# Altium PCB PCB1.PcbDoc (part 1 of 4)
Units mm, origin at the board's own origin, x right, y up, seen from the top; angles counter-clockwise.
Board outline 100 x 100 mm, 4 copper layers (Component Side 1, Ground Plane, Power Plane, Component Side 2), stack 0.844 mm thick; 174 components, 192 nets, 1098 pads, 545 vias.
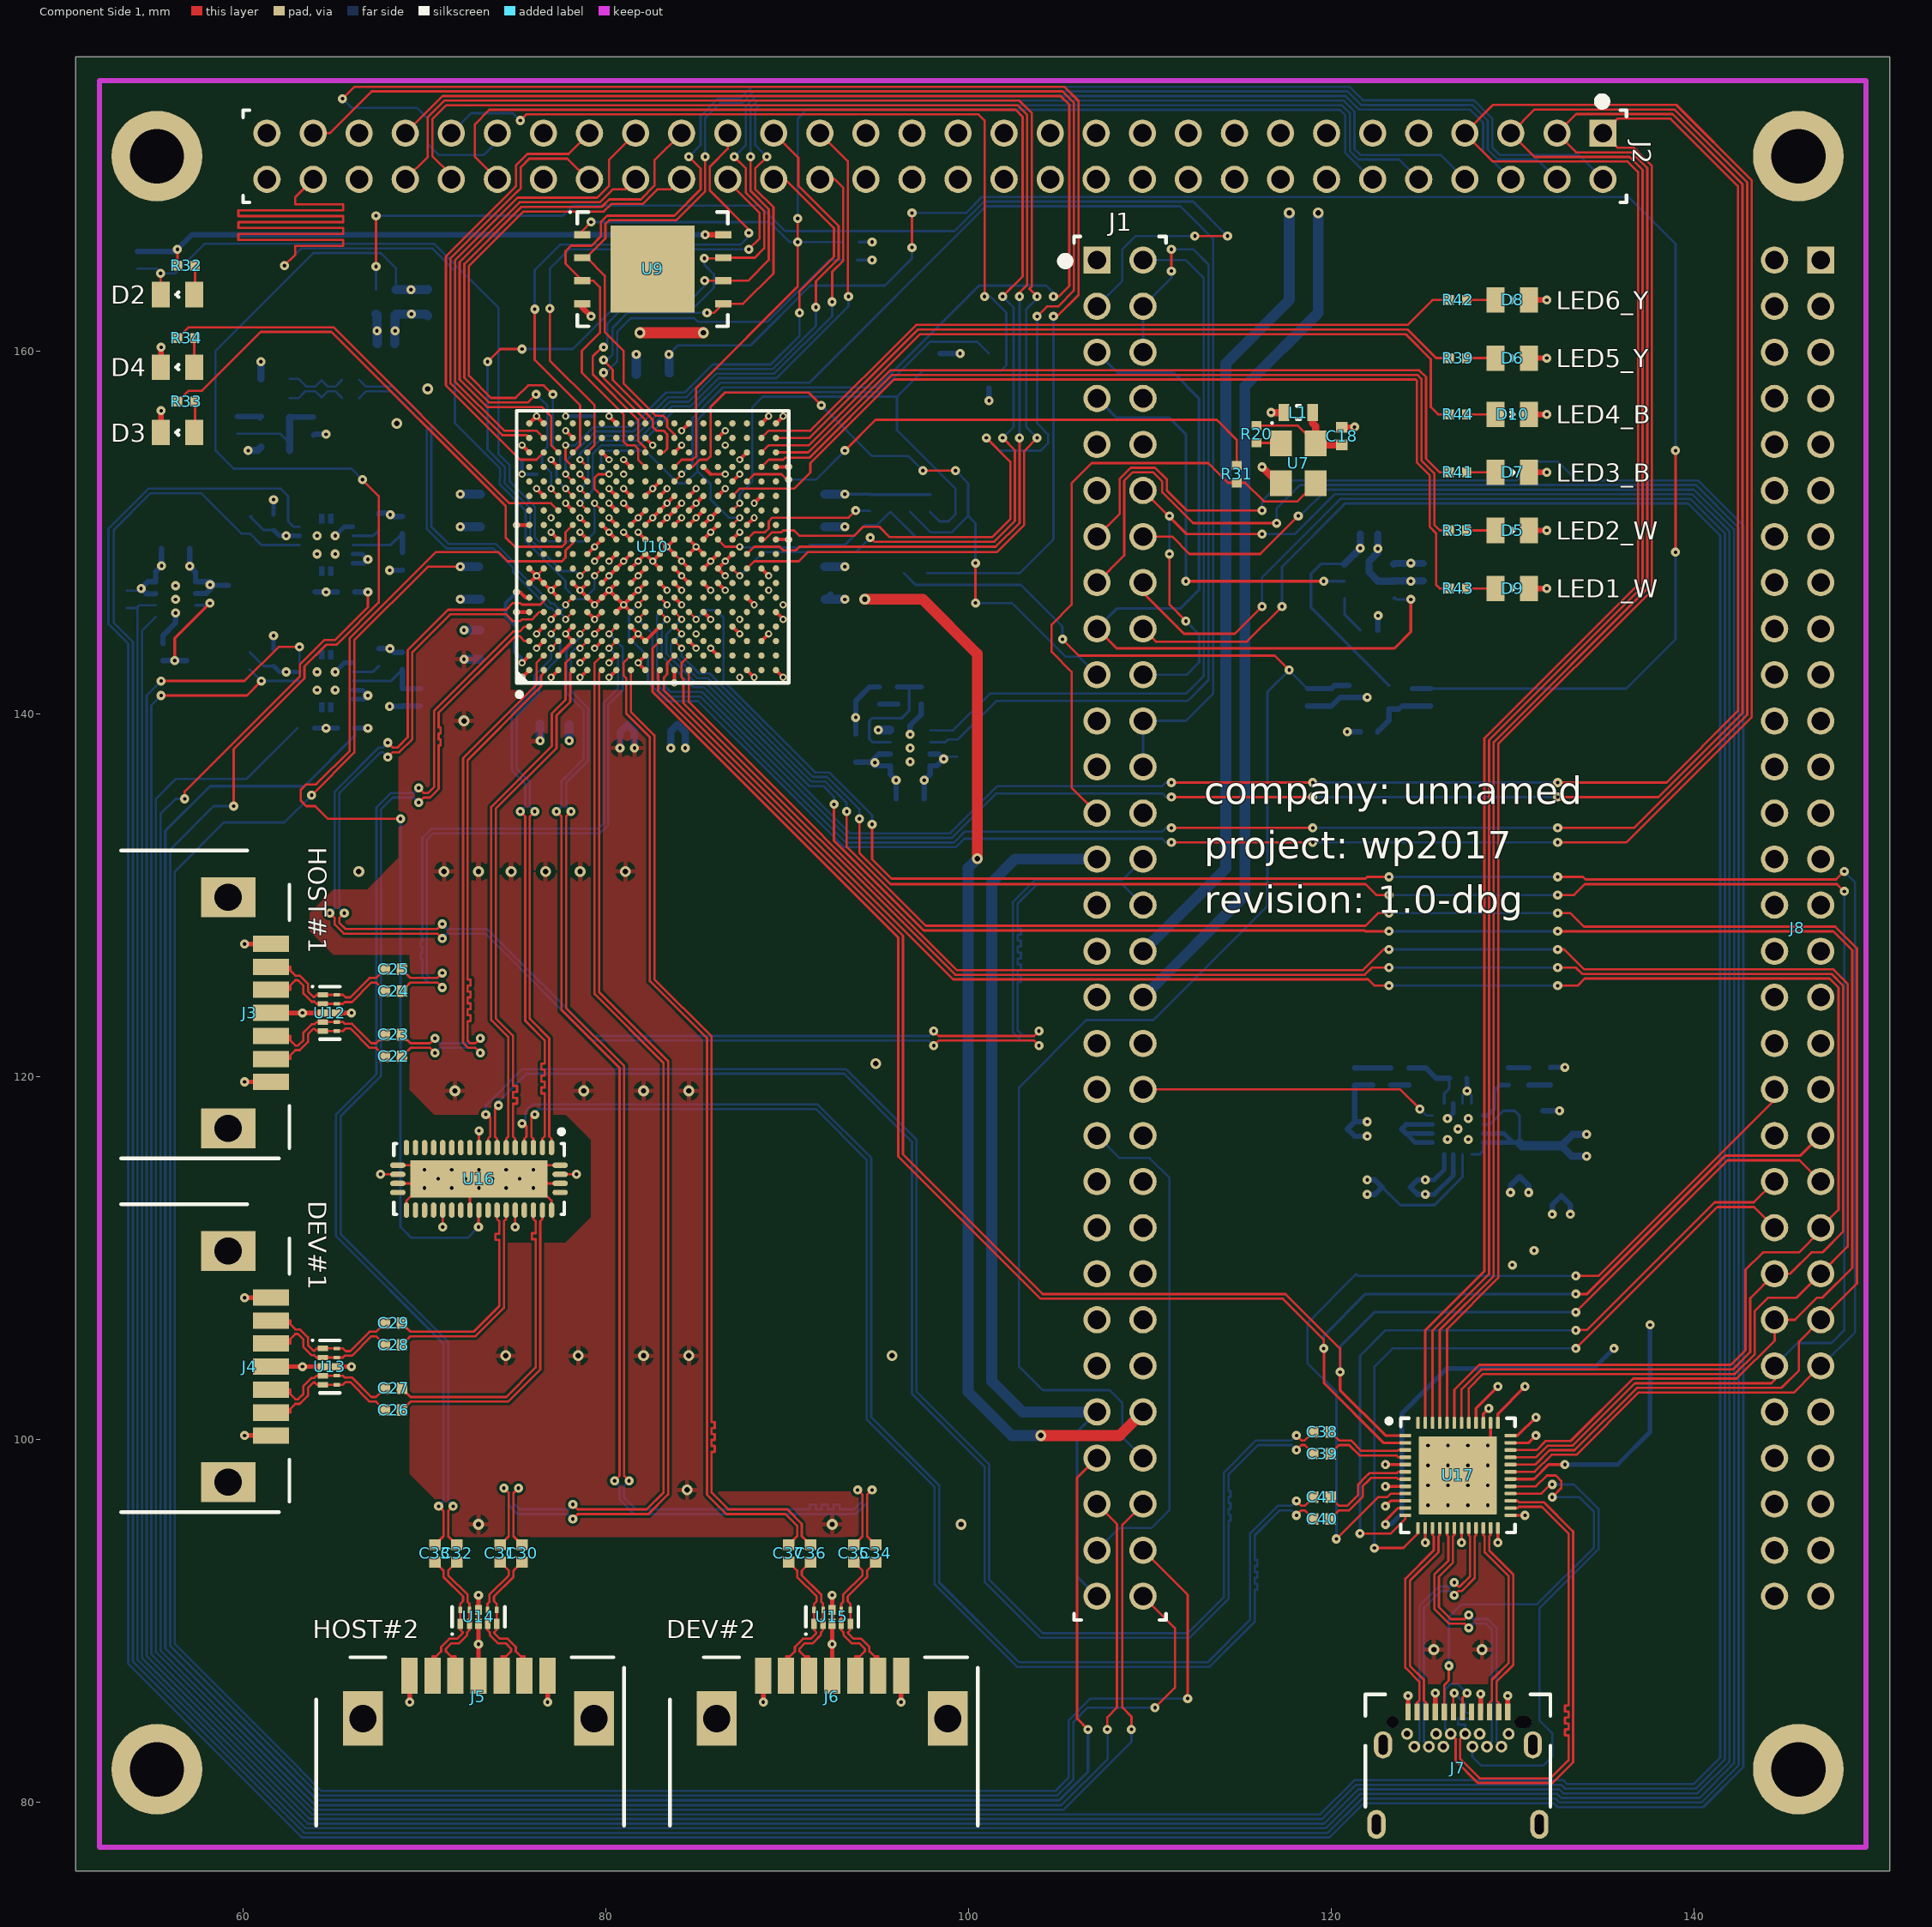
[diagram p0: Component Side 1 view]
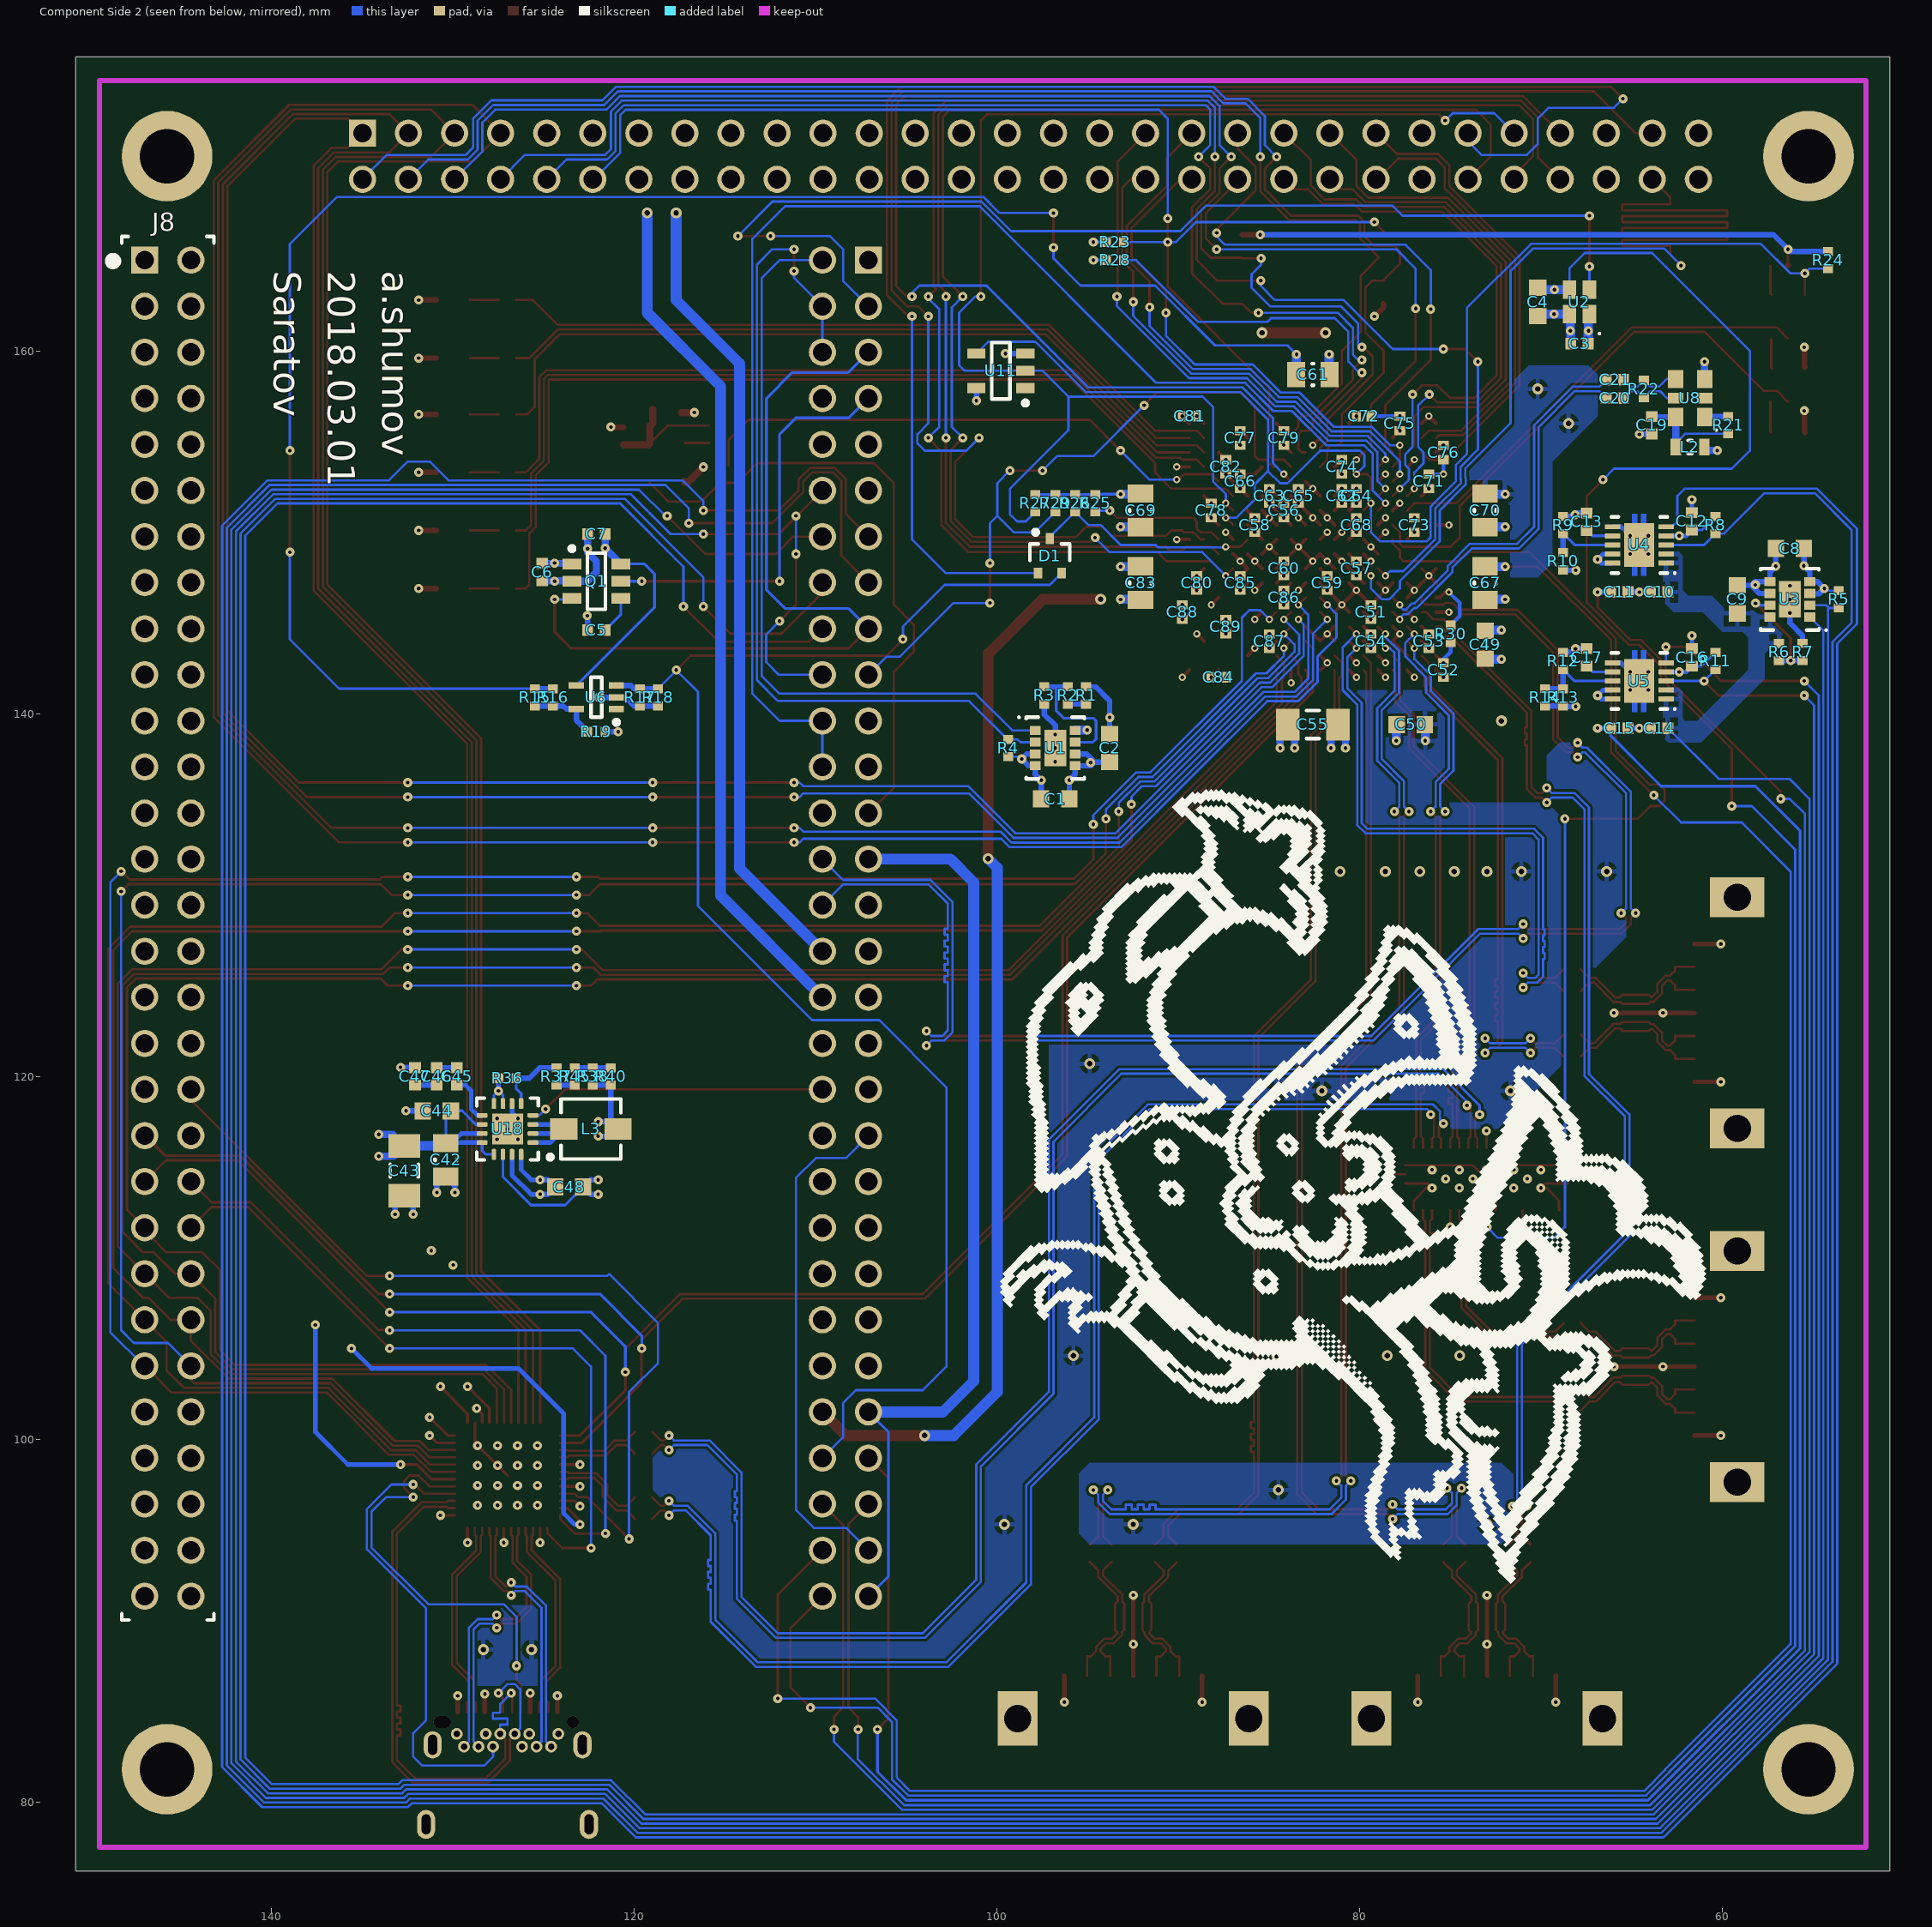
[diagram p1: Component Side 2 view, seen from below]
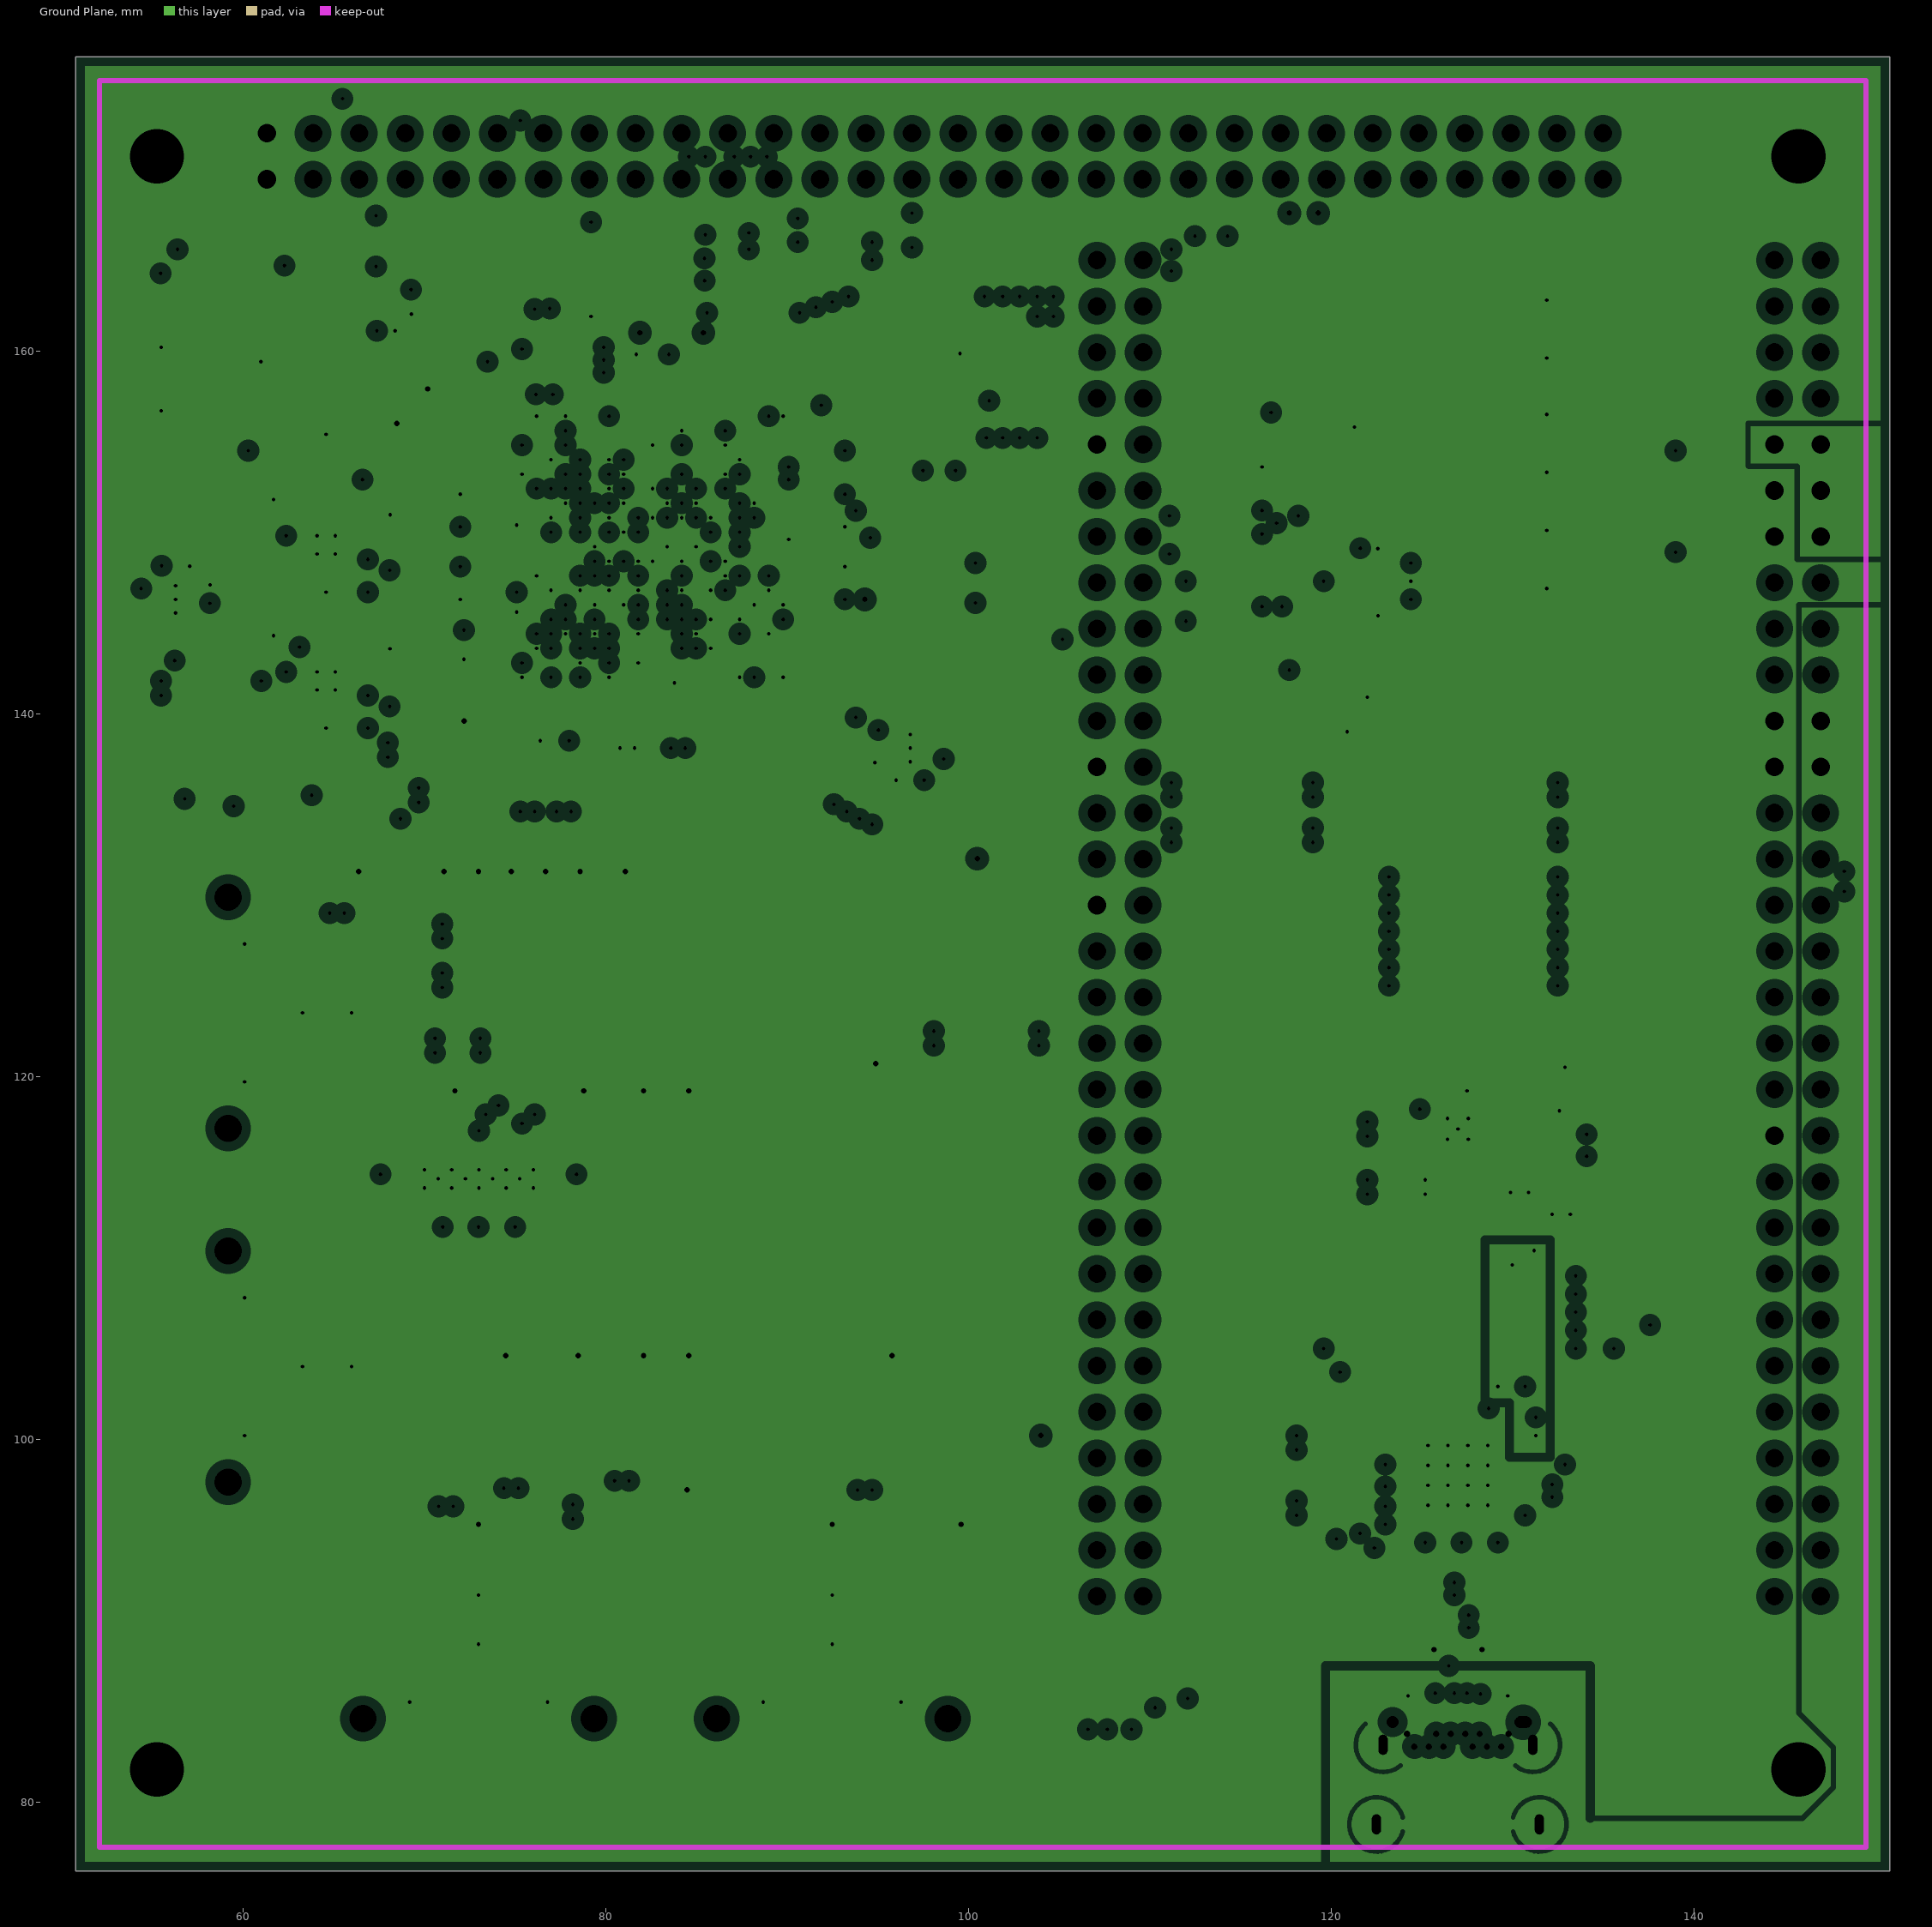
[diagram p2: Ground Plane, clearances drawn from the general rule]
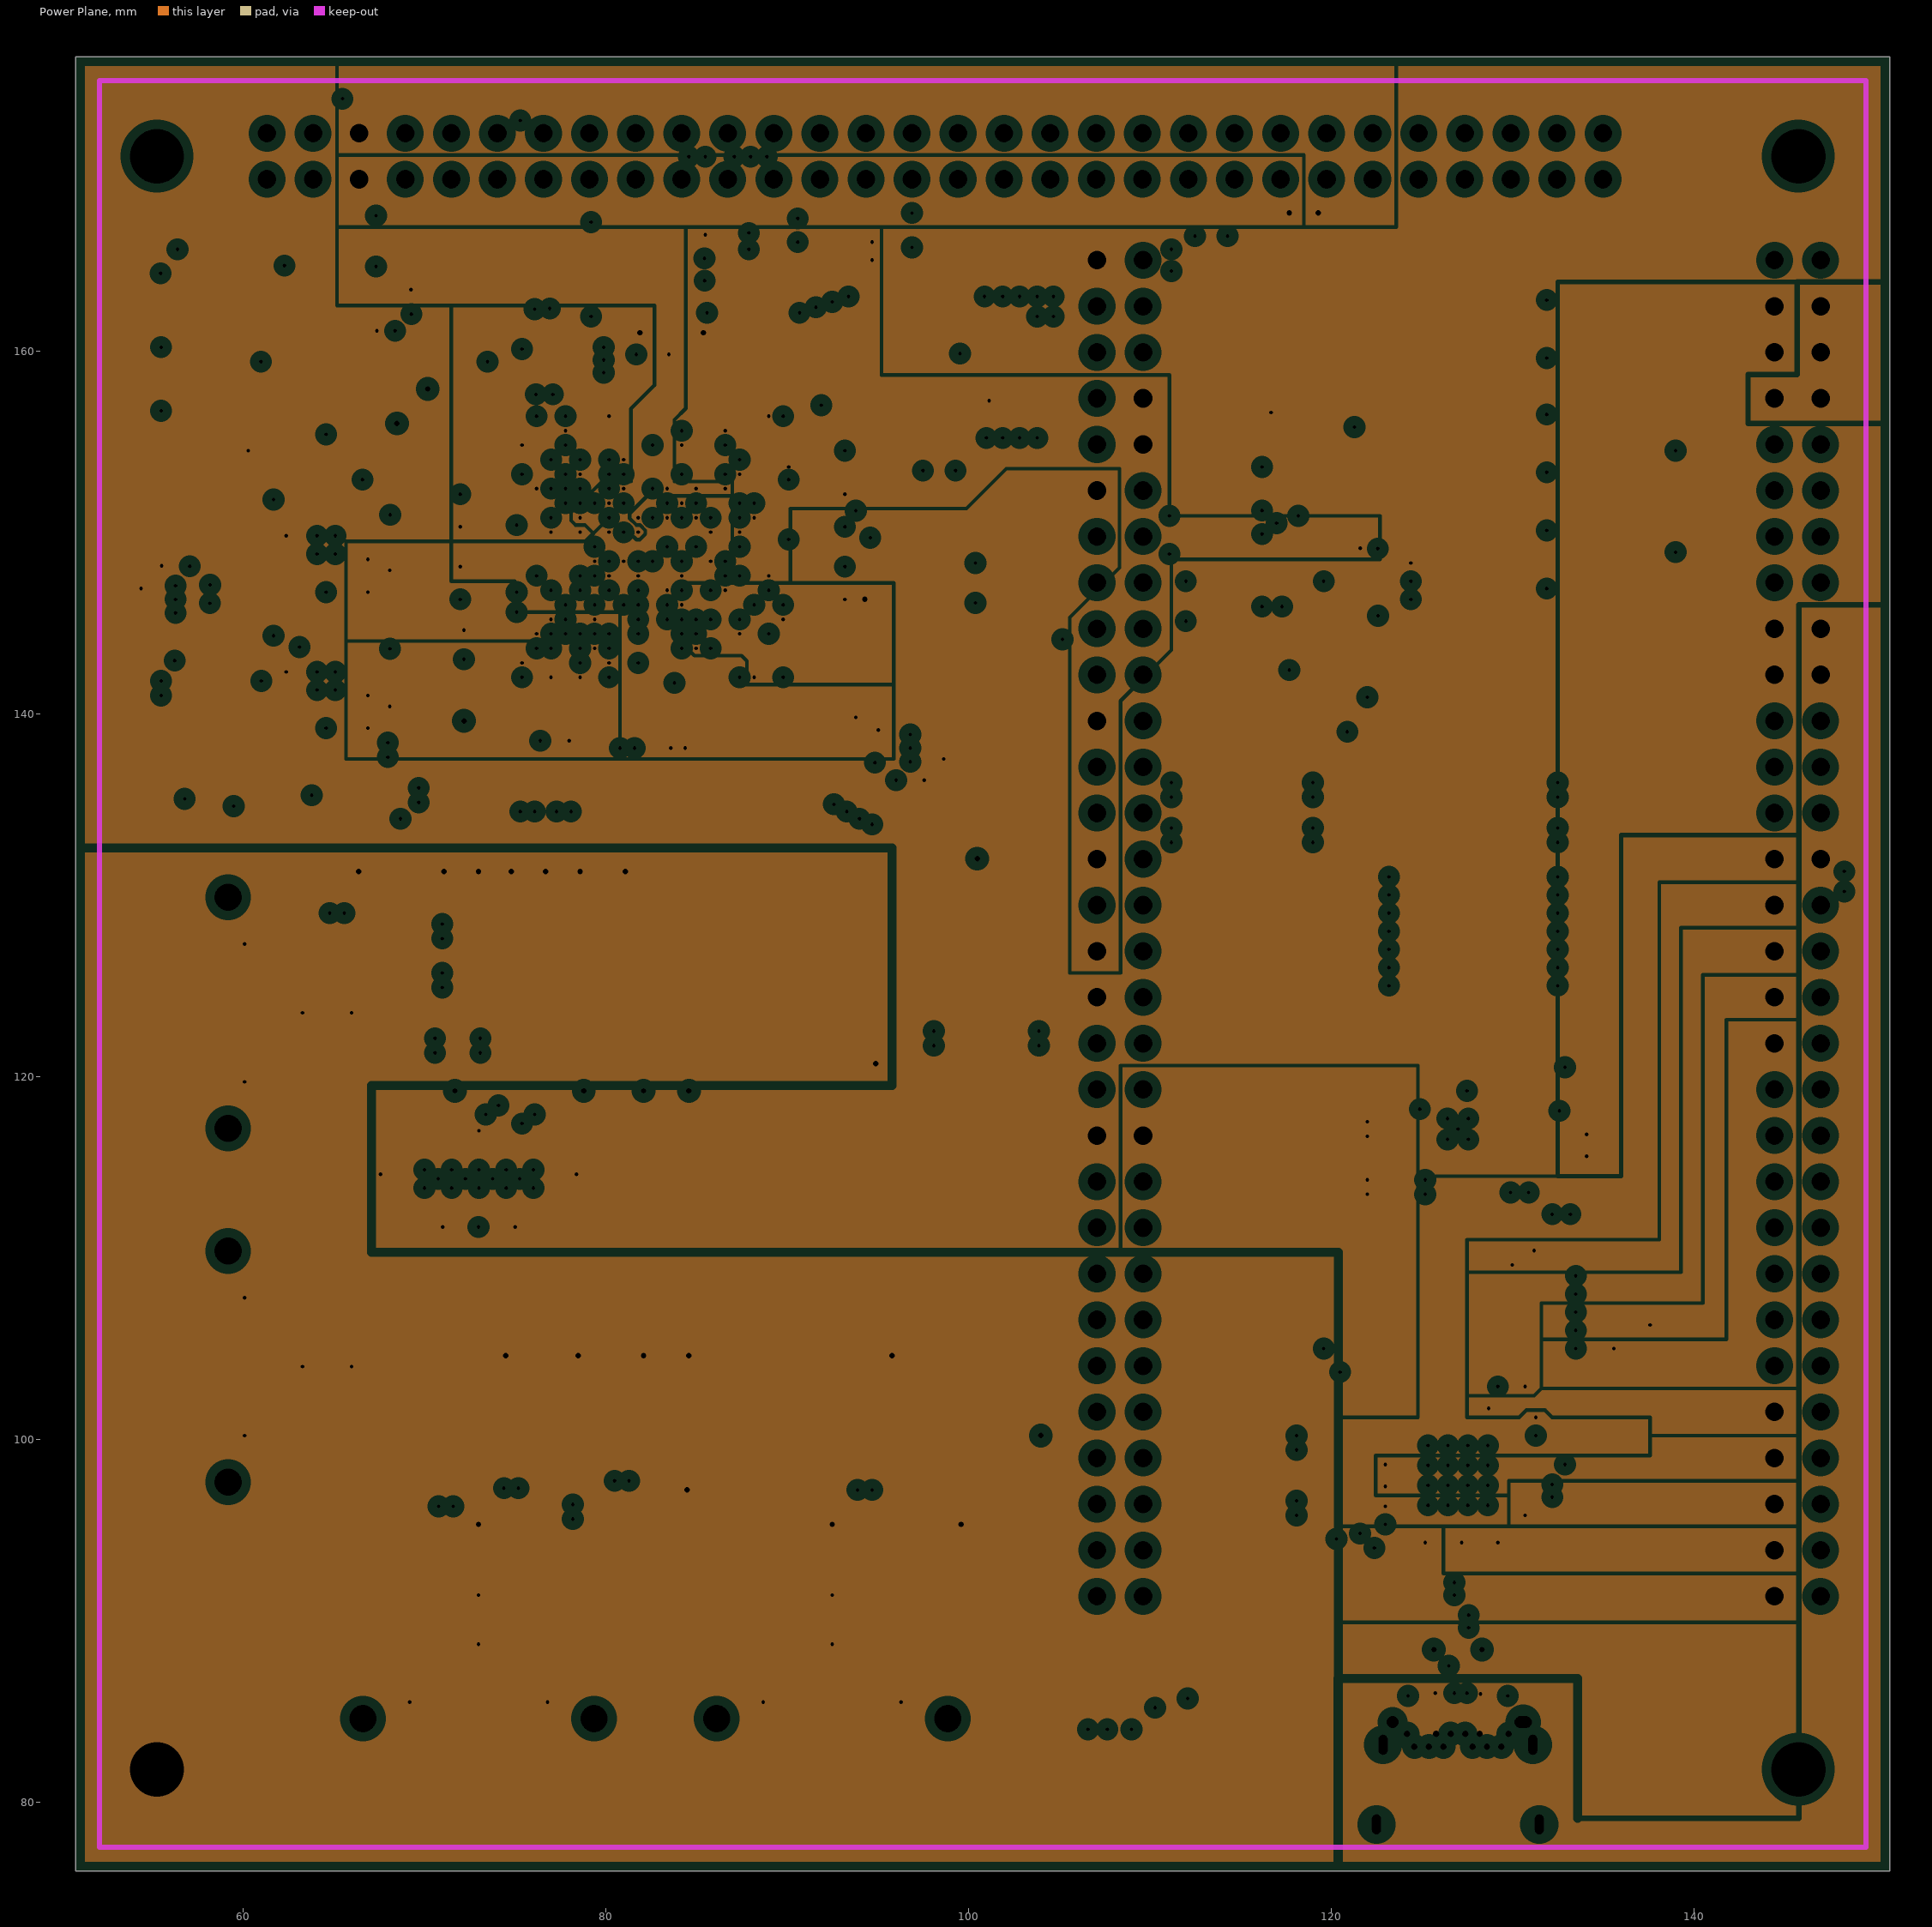
[diagram p3: Power Plane, clearances drawn from the general rule]
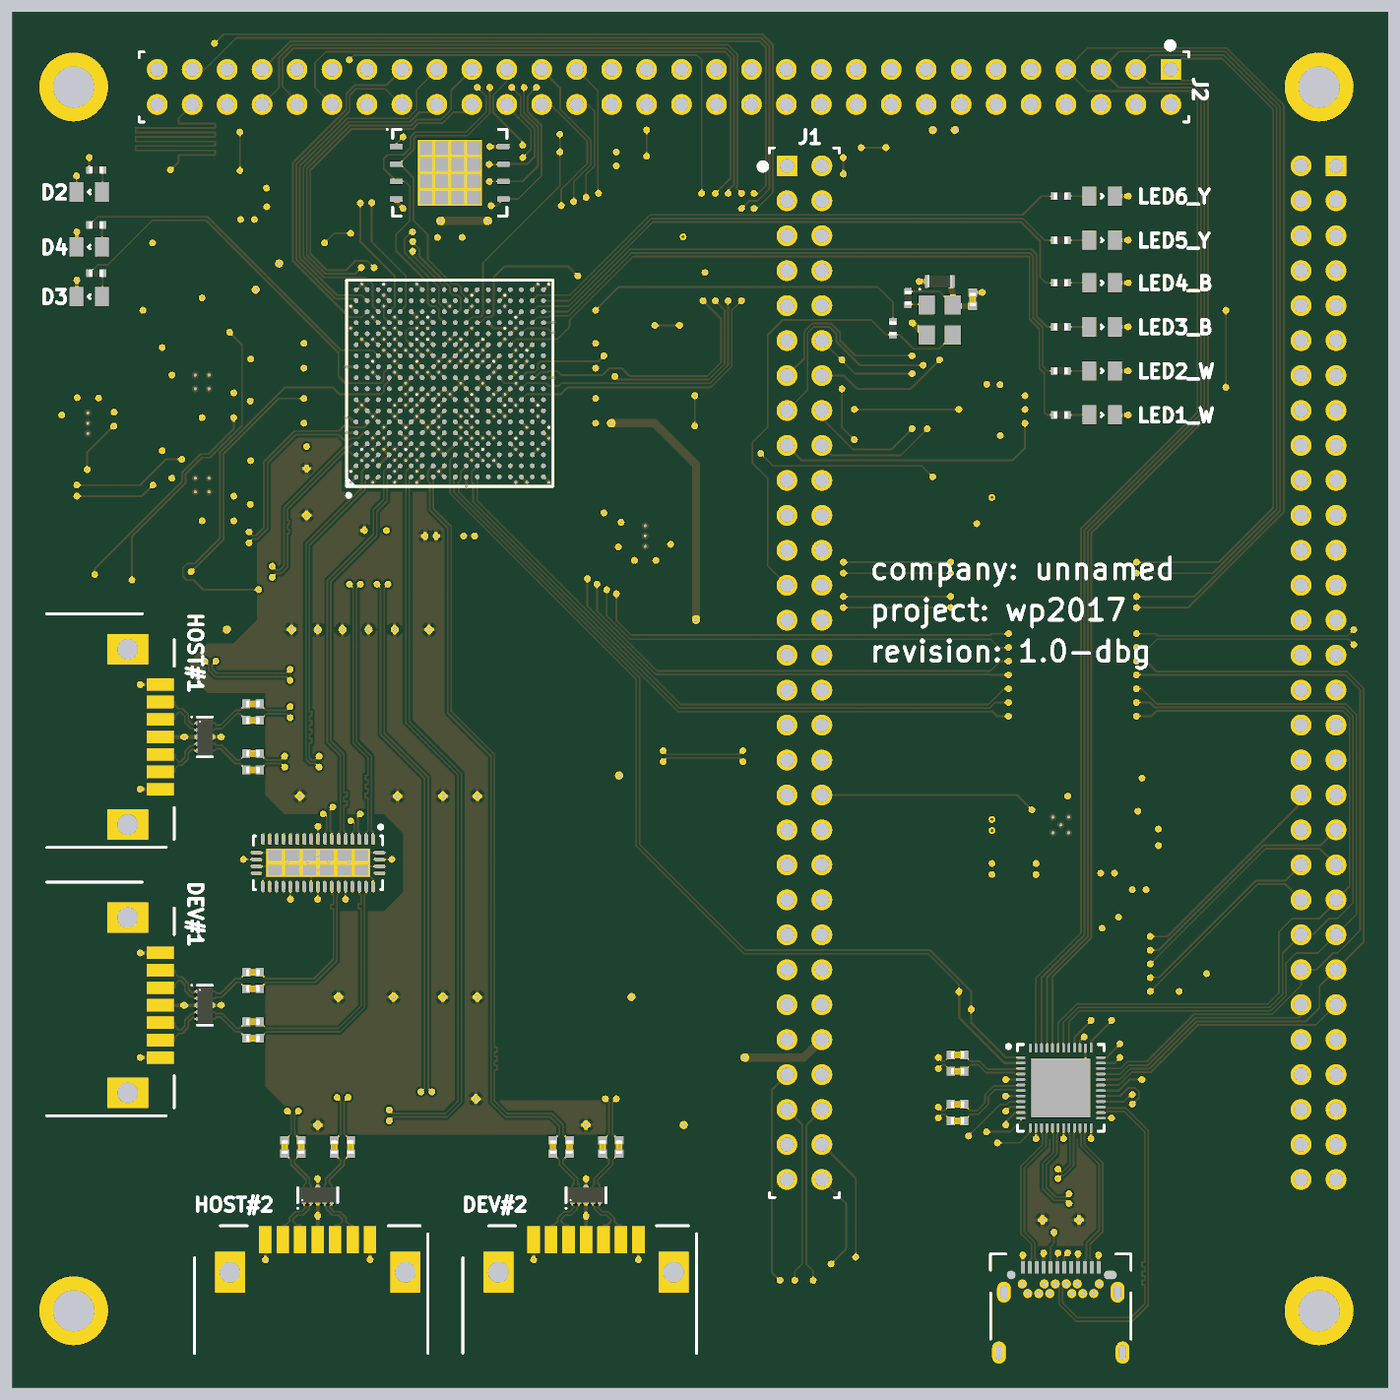
[diagram p6: 3D render of the assembled board from above, using the file's embedded part models]
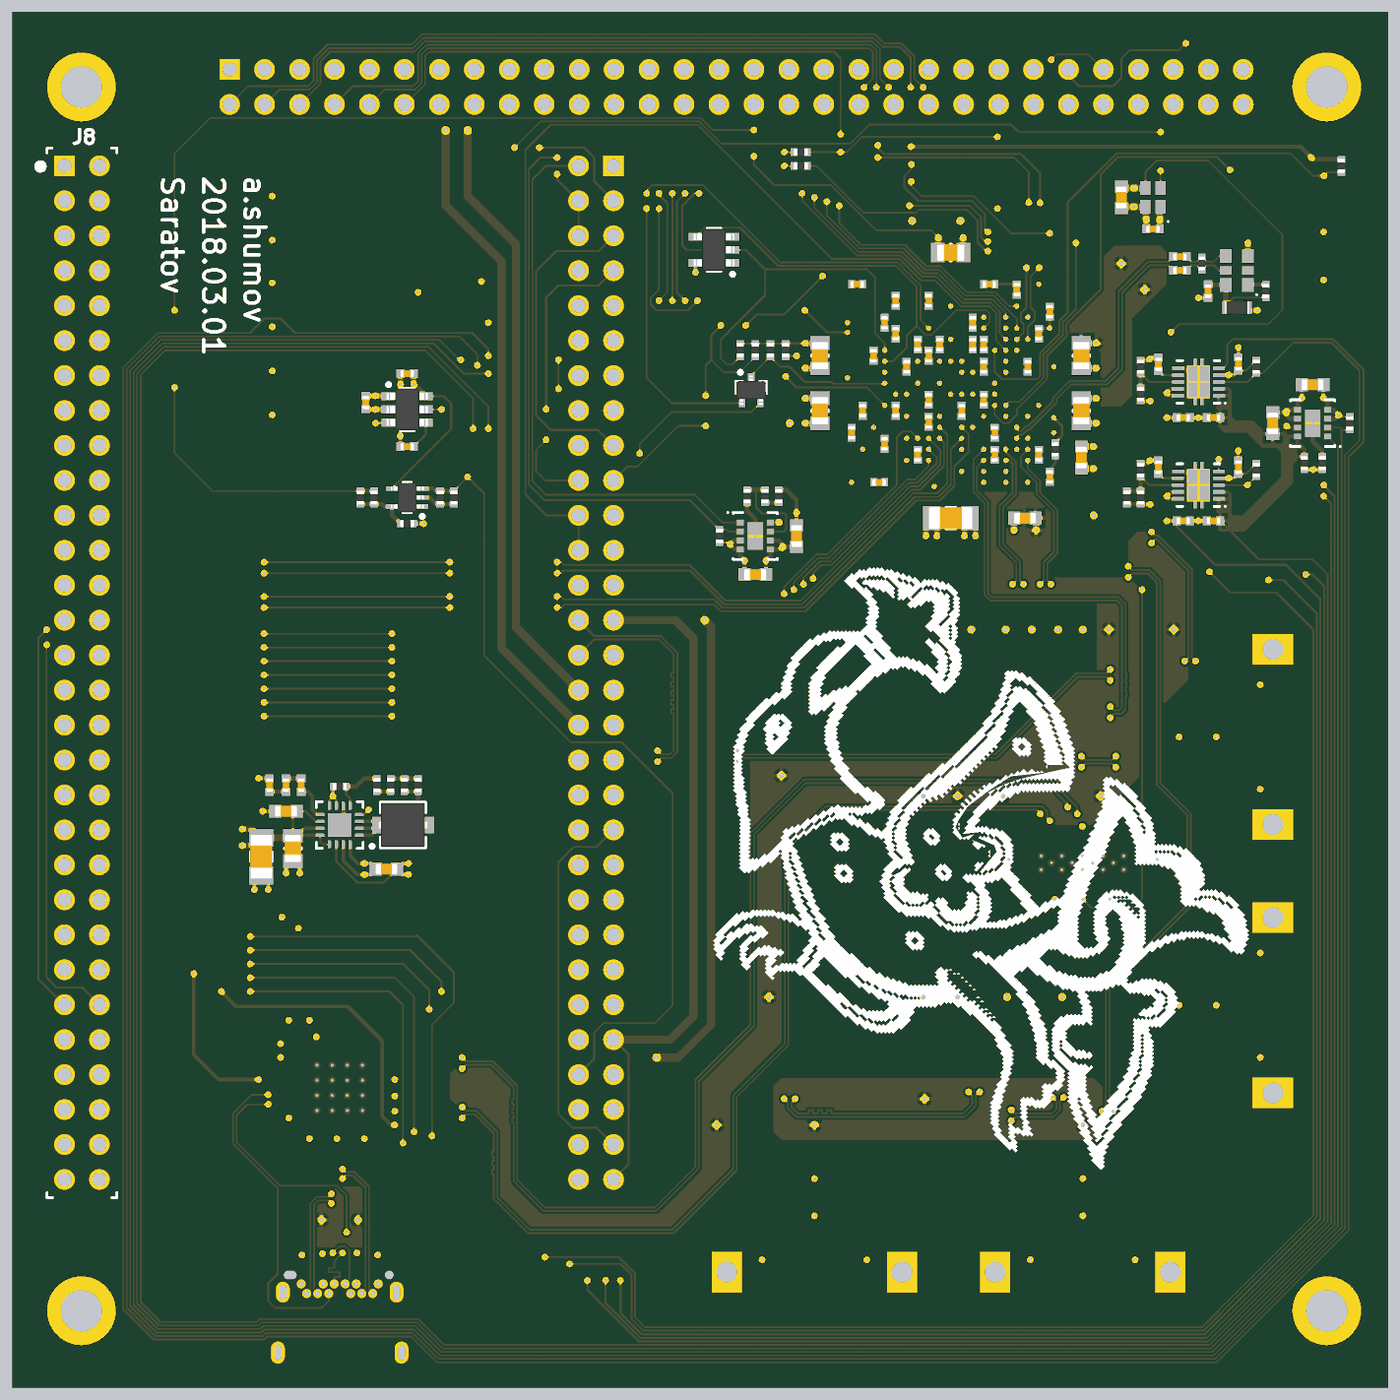
[diagram p7: 3D render of the assembled board from below, using the file's embedded part models]

## Layer stack, top to bottom
Top Solder: solder mask 0.0102, Solder Resist, Dk 3.5
Component Side 1: signal copper 0.0356
Dielectric 1: core 0.32, FR-4, Dk 4.8
Ground Plane: plane copper 0.036, net (Multiple Nets)
Dielectric 3: prepreg 0.127, Dk 4.2
Power Plane: plane copper 0.036, net (Multiple Nets)
Dielectric 4: core 0.254, Dk 4.2
Component Side 2: signal copper 0.0356
Bottom Solder: solder mask 0.0102, Solder Resist, Dk 3.5

## Board outline
50.8,76.2 150.8,76.2 150.8,176.2 50.8,176.2

## Design rules (kind name [scope] priority, off if disabled: settings)
Clearance [All] p1: gap=0.15 ignorepadtopadclearanceinfootprint=FALSE except(0.127: Track-Track)
DiffPairsRouting DiffPairsRouting_1 [WithinRoom('RoomFPGA')] p1: maxlimit=0.152 minlimit=0.102 mostfreqgap=0.127 toplayer_minwidth=0.102 toplayer_maxwidth=0.152 toplayer_prefwidth=0.127 bottomlayer_minwidth=0.102 bottomlayer_maxwidth=0.152 bottomlayer_prefwidth=0.127 maxuncoupledlength=12.7
DiffPairsRouting [InDifferentialPairClass('All Differential Pairs')] p2: maxlimit=0.508 minlimit=0.127 mostfreqgap=0.127 toplayer_minwidth=0.127 toplayer_maxwidth=0.127 toplayer_prefwidth=0.127 bottomlayer_minwidth=0.127 bottomlayer_maxwidth=0.127 bottomlayer_prefwidth=0.127 maxuncoupledlength=12.7
HoleSize [All] p1: absolutevalues=TRUE maxlimit=6.4 minlimit=0.2 maxpercent=80.000 minpercent=20.000
MatchedLengths [InNet('UCONN0_D_P') OR InNet('UCONN0_D_N')] p1: tolerance=1 checknetsindiffpair=TRUE checkdiffpairvsdiffpair=FALSE checkxsignals=FALSE checkothers=FALSE
MatchedLengths DiffPair_MatchedLengths [InDifferentialPairClass('All Differential Pairs')] p2: tolerance=0.1 checknetsindiffpair=TRUE checkdiffpairvsdiffpair=FALSE checkxsignals=FALSE checkothers=FALSE
MinimumAnnularRing [All] p1: minimumring=0.1
MinimumSolderMaskSliver MinimumSolderMaskSliver_1 [InComponent('U12') OR InComponent('U13') OR InComponent('U14') OR InComponent('U15') OR InComponent('J7') OR InComponent('U17')] p1: minsoldermaskwidth=0
MinimumSolderMaskSliver [All] p2: minsoldermaskwidth=0.1
PlaneClearance PlaneClearance_2 [IsVia] p1: clearance=0.2
PlaneClearance PlaneClearance_1 [InNet('UCONN0_PWR') OR InNet('UCONN0_GND')] p2: clearance=0.4
PlaneClearance [All] p3: clearance=0.508
PlaneConnect PlaneConnect_1 [InNet('UCONN0_PWR') OR InNet('UCONN0_GND')] p1: planeconnectstyle=Direct reliefexpansion=0.508 reliefentries=4 reliefconductorwidth=0.254 reliefairgap=0.254
PlaneConnect [All] p2: pad.planeconnectstyle=Relief pad.reliefexpansion=0.508 pad.reliefentries=4 pad.reliefconductorwidth=0.508 pad.reliefairgap=0.127 via.planeconnectstyle=Direct via.reliefexpansion=0.508 via.reliefentries=4 via.reliefconductorwidth=0.254 via.reliefairgap=0.254
PolygonConnect [All] p1: connectstyle=Relief reliefconductorwidth=0.254 reliefentries=4 polygonreliefangle="90 Angle" airgapwidth=0.254
RoomDefinition Sheet13 [InComponentClass('Sheet13')] p1 off: confinementstyle=ConfineIn formatcopy=TRUE lockcomponents=FALSE outline 0,0 50.8,0 50.8,25.4 0,25.4
RoomDefinition Sheet12 [InComponentClass('Sheet12')] p2 off: confinementstyle=ConfineIn formatcopy=TRUE lockcomponents=FALSE outline 0,0 50.8,0 50.8,25.4 0,25.4
RoomDefinition Sheet11 [InComponentClass('Sheet11')] p3 off: confinementstyle=ConfineIn formatcopy=TRUE lockcomponents=FALSE outline 0,0 50.8,0 50.8,25.4 0,25.4
RoomDefinition Sheet10 [InComponentClass('Sheet10')] p4 off: confinementstyle=ConfineIn formatcopy=TRUE lockcomponents=FALSE outline 0,0 50.8,0 50.8,25.4 0,25.4
RoomDefinition Sheet9 [InComponentClass('Sheet9')] p5 off: confinementstyle=ConfineIn formatcopy=TRUE lockcomponents=FALSE outline 0,0 50.8,0 50.8,25.4 0,25.4
RoomDefinition Sheet8 [InComponentClass('Sheet8')] p6 off: confinementstyle=ConfineIn formatcopy=TRUE lockcomponents=FALSE outline 0,0 50.8,0 50.8,25.4 0,25.4
RoomDefinition Sheet7 [InComponentClass('Sheet7')] p7 off: confinementstyle=ConfineIn formatcopy=TRUE lockcomponents=FALSE outline 0,0 50.8,0 50.8,25.4 0,25.4
RoomDefinition Sheet6 [InComponentClass('Sheet6')] p8 off: confinementstyle=ConfineIn formatcopy=TRUE lockcomponents=FALSE outline 0,0 50.8,0 50.8,25.4 0,25.4
RoomDefinition Sheet5 [InComponentClass('Sheet5')] p9 off: confinementstyle=ConfineIn formatcopy=TRUE lockcomponents=FALSE outline 0,0 50.8,0 50.8,25.4 0,25.4
RoomDefinition Sheet4 [InComponentClass('Sheet4')] p10 off: confinementstyle=ConfineIn formatcopy=TRUE lockcomponents=FALSE outline 0,0 50.8,0 50.8,25.4 0,25.4
RoomDefinition Sheet3 [InComponentClass('Sheet3')] p11 off: confinementstyle=ConfineIn formatcopy=TRUE lockcomponents=FALSE outline 0,0 50.8,0 50.8,25.4 0,25.4
RoomDefinition Sheet2 [InComponentClass('Sheet2')] p12 off: confinementstyle=ConfineIn formatcopy=TRUE lockcomponents=FALSE outline 0,0 50.8,0 50.8,25.4 0,25.4
RoomDefinition Sheet1 [InComponentClass('Sheet1')] p13 off: confinementstyle=ConfineIn formatcopy=TRUE lockcomponents=FALSE outline 0,0 50.8,0 50.8,25.4 0,25.4
RoutingVias [All] p1: holewidth=0.2 width=0.4 viastyle="Through Hole" minholewidth=0.2 minwidth=0.4 maxholewidth=6.3 maxwidth=6.5
SilkToSolderMaskClearance [IsPad] p1: minsilkscreentomaskgap=0.2 clearancetoexposedcopper=TRUE
SolderMaskExpansion SolderMaskExpansion_1 [IsVia] p1: expansion=0 useseparateexpansions=TRUE expansionbottom=0 soldermaskfromhole=TRUE
SolderMaskExpansion [All] p2: expansion=0.05
Width Width_1 [WithinRoom('RoomFPGA')] p1: maxlimit=0.152 minlimit=0.102 preferedwidth=0.127
Width [All] p2: maxlimit=1.27 minlimit=0.127 preferedwidth=0.127
24 further rules are at their usual default settings.

## Classes and differential pairs
component class Sheet13: C42 C43 C44 C45 C46 C47 C48 L3 R36 R37 R38 R40 R45 U18
component class Sheet12: C38 C39 C40 C41 U17
component class Sheet11: J7
component class Sheet10: U16
component class Sheet9: C22 C23 C24 C25 C26 C27 C28 C29 C30 C31 C32 C33 C34 C35 C36 C37 J3 J4 J5 J6 U12 U13 U14 U15
component class Sheet8: C55 C56 C57 C58 C59 C60 C61 C62 C63 C64 C65 C66 C67 C68 C69 C70 C71 C72 C73 C74 C75 C76 C77 C78 C79 C80 C81 C82 C83 C84 C85 C86 C87 C88 C89
component class Sheet7: D1 D2 R23 R24 R25 R26 R27 R28 R32 U9 U11
component class Sheet6: C49 C50 C51 C52 C53 C54 R30
component class Sheet5: D3 D4 D5 D6 D7 D8 D9 D10 Led6 R29 R31 R33 R34 R35 R39 R41 R42 R43 R44 U10
component class Sheet4: C18 C19 C20 C21 L1 L2 R20 R21 R22 U7 U8
component class Sheet3: J1 J2 J8
component class Sheet2: C8 C9 C10 C11 C12 C13 C14 C15 C16 C17 R5 R6 R7 R8 R9 R10 R11 R12 R13 R14 U3 U4 U5
component class Sheet1: C1 C2 C3 C4 C5 C6 C7 Q1 R1 R2 R3 R4 R15 R16 R17 R18 R19 U1 U2 U6
net class VL716_SPI: VL716_SPI_CLK VL716_SPI_CS VL716_SPI_D VL716_SPI_Q
net class MEM_SPI: SPI-CLK SPI-CS SPI-DQ0 SPI-DQ1 SPI-DQ2 SPI-DQ3
differential pair UCONN0_TX2: +UCONN0_TX2_P -UCONN0_TX2_N
differential pair UCONN0_TX1: +UCONN0_TX1_P -UCONN0_TX1_N
differential pair UCONN0_RX2: +UCONN0_RX2_P -UCONN0_RX2_N
differential pair UCONN0_RX1: +UCONN0_RX1_P -UCONN0_RX1_N
differential pair UCONN0_D: +UCONN0_D_P -UCONN0_D_N
differential pair U17A_TX: +U17A_TX_P -U17A_TX_N
differential pair U17A_RX: +U17A_RX_P -U17A_RX_N
differential pair U8_OUT: +U8_OUT_P -U8_OUT_N
differential pair J6_TX: +J6_TX_P -J6_TX_N
differential pair J6_RX: +J6_RX_P -J6_RX_N
differential pair J5_TX: +J5_TX_P -J5_TX_N
differential pair J5_RX: +J5_RX_P -J5_RX_N
differential pair J4_TX: +J4_TX_P -J4_TX_N
differential pair J4_RX: +J4_RX_P -J4_RX_N
differential pair J3_TX: +J3_TX_P -J3_TX_N
differential pair J3_RX: +J3_RX_P -J3_RX_N
differential pair ADV_MGT_CLK: +ADV_MGT_CLK_P -ADV_MGT_CLK_N
differential pair CLK_200M: +CLK_200M_P -CLK_200M_N
differential pair MGTSW_RX: +MGTSW_RX_P -MGTSW_RX_N
differential pair MGTSW_TX: +MGTSW_TX_P -MGTSW_TX_N
differential pair SCONN0_RX: +SCONN0_RX_P -SCONN0_RX_N
differential pair SCONN0_TX: +SCONN0_TX_P -SCONN0_TX_N
differential pair SCONN1_RX: +SCONN1_RX_P -SCONN1_RX_N
differential pair SCONN1_TX: +SCONN1_TX_P -SCONN1_TX_N
differential pair SCONN2_RX: +SCONN2_RX_P -SCONN2_RX_N
differential pair SCONN2_TX: +SCONN2_TX_P -SCONN2_TX_N
differential pair SCONN3_RX: +SCONN3_RX_P -SCONN3_RX_N
differential pair SCONN3_TX: +SCONN3_TX_P -SCONN3_TX_N
differential pair VL716_RX: +VL716_RX_P -VL716_RX_N
differential pair VL716_TX: +VL716_TX_P -VL716_TX_N

## Components (designator, comment, footprint, x,y, rotation, side; value= is the part's Value field where it differs from the comment)
C1 "10uF" CAPC1608X08N 96.8,135.3 r0 bottom
C2 "22uF" CAPC1608X08N 93.8,138.1 r90 bottom
C3 "4.7uF" CAPC1005X05N 67.9,160.4 r180 bottom
C4 "10uF" CAPC1608X08N 70.2,162.7 r90 bottom
C5 "10nF (16V)" CAPC1005X05N 122.1,144.6 r180 bottom
C6 "4.7uF" CAPC1005X05N 125.1,147.8 r90 bottom
C7 "470nF" CAPC1005X05N 122.1,149.9 r180 bottom
C8 "10uF" CAPC1608X08N 56.3,149.1 r180 bottom
C9 "22uF" CAPC1608X08N 59.2,146.3 r270 bottom
C10 "4.7uF" CAPC1005X05N 63.5,146.7 r180 bottom
C11 "4.7uF" CAPC1005X05N 65.7,146.7 r0 bottom
C12 "4.7uF" CAPC1005X05N 61.7,150.6 r270 bottom
C13 "10nF" CAPC1005X05N 67.5,150.58 r270 bottom
C14 "4.7uF" CAPC1005X05N 63.5,139.2 r180 bottom
C15 "4.7uF" CAPC1005X05N 65.7,139.2 r0 bottom
C16 "4.7uF" CAPC1005X05N 61.7,143.1 r270 bottom
C17 "10nF" CAPC1005X05N 67.5,143.1 r270 bottom
C18 "470nF" CAPC1005X05N 120.6,155.3 r90 top
C19 "470nF" CAPC1005X05N 63.9,155.9 r270 bottom
C20 "100nF" CAPC1005X05N 65.95,157.4 r180 bottom
C21 "100nF" CAPC1005X05N 65.95,158.4 r180 bottom
C22 "100nF" CAPC1005X05N 68.3,121.1 r180 top
C23 "100nF" CAPC1005X05N 68.3,122.3 r180 top
C24 "100nF" CAPC1005X05N 68.3,124.7 r180 top
C25 "100nF" CAPC1005X05N 68.3,125.9 r180 top
C26 "100nF" CAPC1005X05N 68.3,101.6 r180 top
C27 "100nF" CAPC1005X05N 68.3,102.8 r180 top
C28 "100nF" CAPC1005X05N 68.3,105.2 r180 top
C29 "100nF" CAPC1005X05N 68.3,106.4 r180 top
C30 "100nF" CAPC1005X05N 75.4,93.7 r270 top
C31 "100nF" CAPC1005X05N 74.2,93.7 r270 top
C32 "100nF" CAPC1005X05N 71.8,93.7 r270 top
C33 "100nF" CAPC1005X05N 70.6,93.7 r270 top
C34 "100nF" CAPC1005X05N 94.9,93.7 r270 top
C35 "100nF" CAPC1005X05N 93.7,93.7 r270 top
C36 "100nF" CAPC1005X05N 91.3,93.7 r270 top
C37 "100nF" CAPC1005X05N 90.1,93.7 r270 top
C38 "100nF" CAPC1005X05N 119.5,100.4 r180 top
C39 "100nF" CAPC1005X05N 119.5,99.2 r180 top
C40 "100nF" CAPC1005X05N 119.5,95.6 r180 top
C41 "100nF" CAPC1005X05N 119.5,96.8 r180 top
C42 "47uF" CAPC2012X12N 130.4,115.4 r270 bottom
C43 "10uF (25V)" CAPC3216X16N 132.7,114.8 r270 bottom
C44 "100nF" CAPC1608X08N 130.9,118.1 r180 bottom
C45 "10nF" CAPC1005X05N 129.8,120 r270 bottom
C46 "10nF" CAPC1005X05N 130.9,120 r90 bottom
C47 "10nF" CAPC1005X05N 132.1,120 r270 bottom
C48 "22uF" CAPC1608X08N 123.6,113.9 r0 bottom
C49 "4.7uF" CAPC1608X08N 73.1,143.8 r90 bottom
C50 "4.7uF" CAPC1608X08N 77.2,139.4 r0 bottom
C51 "100nF" CAPC1005X05L 79.4,145.6 r270 bottom
C52 "100nF" CAPC1005X05L 75.4,142.4 r90 bottom
C53 "100nF" CAPC1005X05L 76.2,144 r90 bottom
C54 "100nF" CAPC1005X05L 79.4,144 r270 bottom
C55 "100uF" CAPC3216X16N 82.6,139.4 r0 bottom
C56 "4.7uF" CAPC1005X05L 84.2,151.2 r90 bottom
C57 "4.7uF" CAPC1005X05L 80.2,148 r270 bottom
C58 "470nF" CAPC1005X05L 85.8,150.4 r270 bottom
C59 "470nF" CAPC1005X05L 81.8,147.2 r90 bottom
C60 "470nF" CAPC1005X05L 84.2,148 r270 bottom
C61 "47uF" CAPC2012X12N 82.6,158.7 r180 bottom
C62 "4.7uF" CAPC1005X05L 81,152 r270 bottom
C63 "4.7uF" CAPC1005X05L 85,152 r270 bottom
C64 "470nF" CAPC1005X05L 80.2,152 r90 bottom
C65 "470nF" CAPC1005X05L 83.4,152 r270 bottom
C66 "470nF" CAPC1005X05L 86.6,152.8 r90 bottom
C67 "47uF" CAPC2012X12N 73.1,147.2 r90 bottom
C68 "470nF" CAPC1005X05L 80.2,150.4 r90 bottom
C69 "47uF" CAPC2012X12N 92.1,151.2 r90 bottom
C70 "47uF" CAPC2012X12N 73.1,151.2 r270 bottom
C71 "4.7uF" CAPC1005X05L 76.2,152.8 r270 bottom
C72 "4.7uF" CAPC1005X05L 79.8,156.4 r0 bottom
C73 "470nF" CAPC1005X05L 77,150.4 r270 bottom
C74 "470nF" CAPC1005X05L 81,153.6 r90 bottom
C75 "470nF" CAPC1005X05L 77.8,156 r270 bottom
C76 "470nF" CAPC1005X05L 75.4,154.4 r90 bottom
C77 "4.7uF" CAPC1005X05L 86.6,155.2 r90 bottom
C78 "4.7uF" CAPC1005X05L 88.2,151.2 r270 bottom
C79 "470nF" CAPC1005X05L 84.2,155.2 r270 bottom
C80 "470nF" CAPC1005X05L 89,147.2 r90 bottom
C81 "470nF" CAPC1005X05L 89.4,156.4 r180 bottom
C82 "470nF" CAPC1005X05L 87.4,153.6 r270 bottom
C83 "47uF" CAPC2012X12N 92.1,147.2 r270 bottom
C84 "4.7uF" CAPC1005X05L 87.8,142 r0 bottom
C85 "4.7uF" CAPC1005X05L 86.6,147.2 r270 bottom
C86 "470nF" CAPC1005X05L 84.2,146.4 r270 bottom
C87 "470nF" CAPC1005X05L 85,144 r270 bottom
C88 "470nF" CAPC1005X05L 89.8,145.6 r270 bottom
C89 "470nF" CAPC1005X05L 87.4,144.8 r270 bottom
D1 "BAT54AW-7-F" BAT54AW-7-F 97.1,148.7 r90 bottom
D2 "DONE" LEDC2012X10N 56.4,163.1 r0 top
D3 "RED" LEDC2012X10N 56.4,155.5 r0 top
D4 "GREEN" LEDC2012X10N 56.4,159.1 r0 top
D5 "LED2_W" LEDC2012X10N 130,150.1 r180 top
D6 "LED5_Y" LEDC2012X10N 130,159.6 r180 top
D7 "LED3_B" LEDC2012X10N 130,153.3 r180 top
D8 "LED6_Y" LEDC2012X10N 130,162.8 r180 top
D9 "LED1_W" LEDC2012X10N 130,146.9 r180 top
D10 "LED4_B" LEDC2012X10N 130,156.5 r180 top
J1 "60PIN-HEADER" 60PIN-HEADER#1 107.1,165 r0 top
J2 "60PIN-HEADER" 60PIN-HEADER#1 135,172 r270 top
J3 "HOST#1" 5607-4200-SH 58.3,123.5 r90 top
J4 "DEV#1" 5607-4200-SH 58.3,104 r90 top
J5 "HOST#2" 5607-4200-SH 73,83.7 r180 top
J6 "DEV#2" 5607-4200-SH 92.5,83.7 r180 top
J7 "MC001002" MC001002 127,84.4 r0 top
J8 "60PIN-HEADER" 60PIN-HEADER#2 147,165 r180 top
L1 "BKP1608HS121-T" INDC1608X08N 118.2,156.6 r180 top
L2 "BKP1608HS121-T" INDC1608X08N 61.8,154.7 r180 bottom
L3 "2.2uH" IHLP1212BZER2R2M11 122.4,117.1 r180 bottom
Q1 "TPS22918DBVR" TPS22918DBVR 122.1,147.3 r180 bottom
R1 "20K" RESC1005X05N 95.1,141 r90 bottom
R2 "20K" RESC1005X05N 96.1,141 r270 bottom
R3 "160K" RESC1005X05N 97.4,141 r90 bottom
R4 "4K99" RESC1005X05N 99.4,138.1 r270 bottom
R5 "4K99" RESC1005X05N 53.6,146.3 r90 bottom
R6 "110K" RESC1005X05N 56.9,143.4 r90 bottom
R7 "160K" RESC1005X05N 55.6,143.4 r270 bottom
R8 "4K99" RESC1005X05N 60.4,150.4 r90 bottom
R9 "4K99" RESC1005X05N 68.8,150.4 r90 bottom
R10 "1K3" RESC1005X05N 68.8,148.4 r270 bottom
R11 "4K99" RESC1005X05N 60.4,142.9 r90 bottom
R12 "4K99" RESC1005X05N 68.8,142.9 r270 bottom
R13 "4K99" RESC1005X05N 68.8,140.9 r90 bottom
R14 "4K99" RESC1005X05N 69.8,140.9 r90 bottom
R15 "4K99" RESC1005X05N 125.5,140.9 r90 bottom
R16 "4K99" RESC1005X05N 124.5,140.9 r90 bottom
R17 "20K" RESC1005X05N 119.7,140.9 r90 bottom
R18 "20K" RESC1005X05N 118.7,140.9 r90 bottom
R19 "8K2" RESC1005X05N 122.1,139 r0 bottom
R20 "4K99" RESC1005X05N 115.9,155.4 r270 top
R21 "4K99" RESC1005X05N 59.7,155.9 r90 bottom
R22 "100R" RESC1005X05N 64.35,157.9 r90 bottom
R23 "4K99" RESC1005X05N 93.5,166 r180 bottom
R24 "4K99" RESC1005X05N 54.2,165 r270 bottom
R25 "4K99" RESC1005X05N 94.6,151.6 r270 bottom
R26 "4K99" RESC1005X05N 95.7,151.6 r270 bottom
R27 "4K99" RESC1005X05N 97.9,151.6 r270 bottom
R28 "1K3" RESC1005X05N 93.5,165 r0 bottom
R29 "4K99" RESC1005X05N 96.8,151.6 r270 bottom
R30 "100R" RESC1005X05N 75,144.4 r90 bottom
R31 "33R" RESC1005X05N 114.8,153.2 r270 top
R32 "1K3" RESC1005X05N 56.9,164.7 r180 top
R33 "1K3" RESC1005X05N 56.9,157.2 r180 top
R34 "1K3" RESC1005X05N 56.9,160.7 r180 top
R35 "1K3" RESC1005X05N 127,150.1 r180 top
R36 "160K" RESC1005X05N 127,119.9 r180 bottom
R37 "200K" RESC1005X05N 124.3,120 r90 bottom
R38 "200K" RESC1005X05N 122.3,120 r270 bottom
R39 "1K3" RESC1005X05N 127,159.6 r180 top
R40 "200K" RESC1005X05N 121.3,120 r270 bottom
R41 "1K3" RESC1005X05N 127,153.3 r180 top
R42 "1K3" RESC1005X05N 127,162.8 r180 top
R43 "1K3" RESC1005X05N 127,146.9 r180 top
R44 "1K3" RESC1005X05N 127,156.5 r180 top
R45 "200K" RESC1005X05N 123.3,120 r270 bottom
U1 "TPS82085SILR" TPS82085SILR 96.8,138.1 r180 bottom
U2 "LXDC2HL18A-052" LXDC2HL18A-052 67.9,162.7 r0 bottom
U3 "TPS82085SILR" TPS82085SILR 56.3,146.3 r0 bottom
U4 "TPS74801DRCR" TPS74801DRCR 64.6,149.3 r0 bottom
U5 "TPS74801DRCR" TPS74801DRCR 64.6,141.8 r0 bottom
U6 "TPS3805H33DCKR" TPS3805H33DCKR 122.1,140.9 r0 bottom
U7 "SiT1602BI-23-33E-25.000000G" SiT1602BI-23-33E-25.000000G 118.2,153.8 r0 top
U8 "DSC1123CI2-200.0000" DSC1123CI2-200.0000 61.8,157.4 r0 bottom
U9 "S25FL256SAGNFI003" S25FL256SAGNFI003 82.6,164.5 r0 top
U10 "XC7A35T-2CSG325I" XC7A35T-2CSG325I 82.6,149.2 r90 top
U11 "SN74LVC1G14DBVR" SN74LVC1G14DBVR 99.8,158.9 r0 bottom
U12 "TPD4E05U06DQAR" TPD4E05U06DQAR 64.8,123.5 r0 top
U13 "TPD4E05U06DQAR" TPD4E05U06DQAR 64.8,104 r0 top
U14 "TPD4E05U06DQAR" TPD4E05U06DQAR 73,90.2 r90 top
U15 "TPD4E05U06DQAR" TPD4E05U06DQAR 92.5,90.2 r90 top
U16 "HD3SS3415RUAR" HD3SS3415RUAR 73.025,114.35 r270 top
U17 "VL716-Q4" VL716-Q4 127,98 r0 top
U18 "TPS62130RGTR" TPS62130RGTR 127,117.1 r0 bottom

## Footprints (in the part's own frame and the unit in brackets; to place one, negate y for a bottom-side part, rotate by r counter-clockwise, add the part's x,y. Pads: shape width x height; smd on the part's side, far side on the other; paste and mask are expansions set on the pad)
60PIN-HEADER#1 [mm] "60PIN-HEADER"
  rect 1.5x1.5 hole 1.02 mask+0: 1(0,0)
  round 1.5 hole 1.02 mask+0: 2(2.54,0) 3(0,-2.54) 4(2.54,-2.54) 5(0,-5.08) 6(2.54,-5.08) 7(0,-7.62) 8(2.54,-7.62) 9(0,-10.16) 10(2.54,-10.16) 11(0,-12.7) 12(2.54,-12.7) 13(0,-15.24) 14(2.54,-15.24) 15(0,-17.78) 16(2.54,-17.78) 17(0,-20.32) 18(2.54,-20.32) 19(0,-22.86) 20(2.54,-22.86) 21(0,-25.4) 22(2.54,-25.4) 23(0,-27.94) 24(2.54,-27.94) 25(0,-30.48) 26(2.54,-30.48) 27(0,-33.02) 28(2.54,-33.02) 29(0,-35.56) 30(2.54,-35.56) 31(0,-38.1) 32(2.54,-38.1) 33(0,-40.64) 34(2.54,-40.64) 35(0,-43.18) 36(2.54,-43.18) 37(0,-45.72) 38(2.54,-45.72) 39(0,-48.26) 40(2.54,-48.26) 41(0,-50.8) 42(2.54,-50.8) 43(0,-53.34) 44(2.54,-53.34) 45(0,-55.88) 46(2.54,-55.88) 47(0,-58.42) 48(2.54,-58.42) 49(0,-60.96) 50(2.54,-60.96) 51(0,-63.5) 52(2.54,-63.5) 53(0,-66.04) 54(2.54,-66.04) 55(0,-68.58) 56(2.54,-68.58) 57(0,-71.12) 58(2.54,-71.12) 59(0,-73.66) 60(2.54,-73.66)
  silkscreen extent -1.95,-74.98 3.81,1.3
60PIN-HEADER#2 [mm] "60PIN-HEADER"
  rect 1.5x1.5 hole 1.02 mask+0: 1(0,0)
  round 1.5 hole 1.02 mask+0: 2(2.54,0) 3(0,2.54) 4(2.54,2.54) 5(0,5.08) 6(2.54,5.08) 7(0,7.62) 8(2.54,7.62) 9(0,10.16) 10(2.54,10.16) 11(0,12.7) 12(2.54,12.7) 13(0,15.24) 14(2.54,15.24) 15(0,17.78) 16(2.54,17.78) 17(0,20.32) 18(2.54,20.32) 19(0,22.86) 20(2.54,22.86) 21(0,25.4) 22(2.54,25.4) 23(0,27.94) 24(2.54,27.94) 25(0,30.48) 26(2.54,30.48) 27(0,33.02) 28(2.54,33.02) 29(0,35.56) 30(2.54,35.56) 31(0,38.1) 32(2.54,38.1) 33(0,40.64) 34(2.54,40.64) 35(0,43.18) 36(2.54,43.18) 37(0,45.72) 38(2.54,45.72) 39(0,48.26) 40(2.54,48.26) 41(0,50.8) 42(2.54,50.8) 43(0,53.34) 44(2.54,53.34) 45(0,55.88) 46(2.54,55.88) 47(0,58.42) 48(2.54,58.42) 49(0,60.96) 50(2.54,60.96) 51(0,63.5) 52(2.54,63.5) 53(0,66.04) 54(2.54,66.04) 55(0,68.58) 56(2.54,68.58) 57(0,71.12) 58(2.54,71.12) 59(0,73.66) 60(2.54,73.66)
5607-4200-SH [mm] "Recommended pcb layout for 5607-4200-SH"
  rect 0.9x2 smd paste-1000 mask+0: 1(-3.809,-3.257) 2(-2.539,-3.257) 3(-1.269,-3.257) 4(0.001,-3.257) 5(1.271,-3.257) 6(2.541,-3.257) 7(3.811,-3.257)
  rect 2.2x3 hole 1.5 paste-1000 mask+0: ""(-6.369,-0.897) ""(6.371,-0.897)
  silkscreen extent -8.03,-4.27 8.95,5
BAT54AW-7-F [mm] "SOT23, 3-Leads, Body 1,97x2,05mm, Pitch 0,65mm, IPC Medium Density"
  rect 0.6x0.47 smd: 1(0.95,0) 2(-0.95,0.65) 3(-0.95,-0.65)
  silkscreen extent -0.25,-1.1 1.42,1.1, body extent -1.05,-1.07 1.05,1.07, height 1
CAPC1005X05L [mm] "Chip Capacitor, 2-Leads, Body 1,00x0,50mm, IPC High Density"
  rect 0.5x0.6 smd mask+0.02: 1(-0.4,0) 2(0.4,0)
  body extent -0.5,-0.25 0.5,0.25, height 0.5
CAPC1005X05N [mm] "Chip Capacitor, 2-Leads, Body 1,00x0,50mm, IPC Medium Density"
  rect 0.6x0.64 smd: 1(-0.48,0) 2(0.48,0)
  body extent -0.5,-0.25 0.5,0.25, height 0.5
CAPC1608X08N [mm] "Chip Capacitor, 2-Leads, Body 1,60x0,80mm, IPC Medium Density"
  rect 0.9x0.95 smd: 1(-0.775,0) 2(0.775,0)
  body extent -0.8,-0.4 0.8,0.4, height 0.8
CAPC2012X12N [mm] "Chip Capacitor, 2-Leads, Body 2,00x1,25mm, IPC Medium Density"
  rect 1x1.4 smd: 1(-0.925,0) 2(0.925,0)
  silkscreen extent -0.05,-0.6 0.05,0.6, body extent -1,-0.6 1,0.6, height 1.2
CAPC3216X16N [mm] "Chip Capacitor, 2-Leads, Body 3,20x1,60mm, IPC Medium Density"
  rect 1.3x1.75 smd: 1(-1.375,0) 2(1.375,0)
  silkscreen extent -0.35,-0.77 0.35,0.77, body extent -1.6,-0.8 1.6,0.8, height 1.6
DSC1123CI2-200.0000 [mm] "PSON, 6-Leads, Body 3,20x2,50mm, Pitch 1,05mm, IPC Medium Density"
  rect 0.85x1 smd mask+0.04: 1(-0.8,1.05) 3(-0.8,-1.05) 4(0.8,-1.05) 6(0.8,1.05)
  rect 0.85x0.6 smd mask+0.04: 2(-0.8,0) 5(0.8,0)
  silkscreen extent -1.49,1.71 -1.39,1.81, body extent -1.25,-1.6 1.25,1.6, height 0.9
HD3SS3415RUAR [mm] "QFN, 42-Leads, Body 3,50x9,00mm, Pitch 0,50mm, Thermal Pad 2,05x7,55mm, IPC Medium Density"
  oval 0.85x0.3 smd paste-0.025 mask+0.04: 1(-1.725,4) 2(-1.725,3.5) 3(-1.725,3) 4(-1.725,2.5) 5(-1.725,2) 6(-1.725,1.5) 7(-1.725,1) 8(-1.725,0.5) 9(-1.725,0) 10(-1.725,-0.5) 11(-1.725,-1) 12(-1.725,-1.5) 13(-1.725,-2) 14(-1.725,-2.5) 15(-1.725,-3) 16(-1.725,-3.5) 17(-1.725,-4) 22(1.725,-4) 23(1.725,-3.5) 24(1.725,-3) 25(1.725,-2.5) 26(1.725,-2) 27(1.725,-1.5) 28(1.725,-1) 29(1.725,-0.5) 30(1.725,0) 31(1.725,0.5) 32(1.725,1) 33(1.725,1.5) 34(1.725,2) 35(1.725,2.5) 36(1.725,3) 37(1.725,3.5) 38(1.725,4)
  oval 0.3x0.85 smd paste-0.025 mask+0.04: 18(-0.75,-4.475) 19(-0.25,-4.475) 20(0.25,-4.475) 21(0.75,-4.475) 39(0.75,4.475) 40(0.25,4.475) 41(-0.25,4.475) 42(-0.75,4.475)
  rect 2.05x7.55 smd paste-1000 mask+0: 43(0,0)
  silkscreen extent -2.72,-4.7 1.95,4.7, body extent -1.8,-4.55 1.8,4.55, height 0.8
IHLP1212BZER2R2M11 [mm] "Molded Inductor, 2-Leads, Body 3,00x3,00mm, IPC Medium Density"
  rect 1.5x1.2 smd: 1(-1.5,0) 2(1.5,0)
  silkscreen extent -1.65,-1.65 1.65,1.65, body extent -1.82,-1.6 1.82,1.6, height 2
INDC1608X08N [mm] "Chip Inductor, 2-Leads, Body 1,60x0,80mm, IPC Medium Density"
  rect 0.58x0.94 smd: 1(-0.79,0) 2(0.79,0)
  silkscreen extent -0.1,-0.37 0.1,0.37, body extent -0.87,-0.48 0.87,0.48, height 0.8
LEDC2012X10N [mm] "Chip LED, 2-Leads, Body 2,00x1,25mm, IPC Medium Density"
  rect 1x1.4 smd: 1(-0.925,0) 2(0.925,0)
  silkscreen extent -0.07,-0.14 0.06,0.14, body extent -1,-0.63 1,0.63, height 1
LXDC2HL18A-052 [mm] "DFN, 4-Leads, Body 2,50x2,00mm, Pitch 1,10mm, IPC Medium Density"
  rect 0.75x1 smd: 1(-0.55,0.675) 2(-0.55,-0.675) 3(0.55,-0.675) 4(0.55,0.675)
  silkscreen extent -1.15,1.7 -1.05,1.8, body extent -1.1,-1.35 1.1,1.35, height 1.1
MC001002 [mm] "Recommended pcb layout for MC001002"
  rect 0.29x0.9 smd mask+0: A1(-2.75,0.56) A2(-2.25,0.56) A3(-1.75,0.56) A4(-1.25,0.56) A5(-0.75,0.56) A6(-0.25,0.56) A7(0.25,0.56) A8(0.75,0.56) A9(1.25,0.56) A10(1.75,0.56) A11(2.25,0.56) A12(2.75,0.56)
  round 0.65 hole 0.35 mask+0: B1(2.8,-0.65) B2(2.4,-1.35) B3(1.6,-1.35) B4(1.2,-0.65) B5(0.8,-1.35) B6(0.4,-0.65) B7(-0.4,-0.65) B8(-0.8,-1.35) B9(-1.2,-0.65) B10(-1.6,-1.35) B11(-2.4,-1.35) B12(-2.8,-0.65)
  oval 1x1.5 hole 0.5 slot 1.1 at 90 deg mask+0: S1(-4.13,-1.25) S2(4.13,-1.25)
  oval 1x1.6 hole 0.5 slot 1.1 at 90 deg mask+0: S3(-4.49,-5.64) S4(4.49,-5.64)
  round 0.65 hole 0.65 unplated mask+0: ""(-3.6,0)
  oval 0.95x0.65 hole 0.65 slot 0.95 at 0 deg unplated mask+0: ""(3.6,0)
  silkscreen extent -5.1,-4.66 5.1,1.53
RESC1005X05N [mm] "Chip Resistor, 2-Leads, Body 1,00x0,50mm, IPC Medium Density"
  rect 0.5x0.55 smd: 1(-0.475,0) 2(0.475,0)
  body extent -0.5,-0.25 0.5,0.25, height 0.5
S25FL256SAGNFI003 [mm] "SON, 8-Leads, Body 6,00x8,00mm, Pitch 1,27mm, Thermal Pad 4,80x4,65mm, IPC Medium Density"
  rect 0.9x0.4 smd: 1(-3.89,1.905) 2(-3.89,0.635) 3(-3.89,-0.635) 4(-3.89,-1.905) 5(3.89,-1.905) 6(3.89,-0.635) 7(3.89,0.635) 8(3.89,1.905)
  rect 4.65x4.8 smd paste-2.325: 9(0,0)
  silkscreen extent -4.6,-3.15 4.15,3.2, body extent -4,-3 4,3, height 0.8
SiT1602BI-23-33E-25.000000G [mm] "DFN, 4-Leads, Body 3,20x2,50mm, Pitch 1,60mm, IPC Medium Density"
  rect 1.2x1.4 smd: 1(-0.95,1.1) 2(-0.95,-1.1) 3(0.95,-1.1) 4(0.95,1.1)
  silkscreen extent -1.5,2.18 -1.4,2.27, body extent -1.28,-1.63 1.27,1.63, height 0.8
SN74LVC1G14DBVR [mm] "SOT23, 5-Leads, Body 2,90x2,80mm, Pitch 0,95mm, IPC Medium Density"
  rect 1x0.55 smd: 1(-1.35,0.95) 2(-1.35,0) 3(-1.35,-0.95) 4(1.35,-0.95) 5(1.35,0.95)
  silkscreen extent -1.47,-1.55 0.5,1.9, body extent -1.5,-1.53 1.5,1.53, height 1.45
TPD4E05U06DQAR [mm] "PSON, 10-Leads, Body 2,50x1,00mm, Pitch 0,50mm, IPC Medium Density"
  rect 0.55x0.3 smd mask+0: 1(-0.385,1) 2(-0.385,0.5) 4(-0.385,-0.5) 5(-0.385,-1)
  rect 0.55x0.4 smd mask+0: 3(-0.385,0) 8(0.385,0)
  rect 0.35x0.2 smd paste-1000 mask-1000: 6(0.385,-1) 7(0.385,-0.5) 9(0.385,0.5) 10(0.385,1)
  silkscreen extent -1,-1.45 0.55,1.5, body extent -0.55,-1.3 0.55,1.3, height 0.55
TPS3805H33DCKR [mm] "SOT23, 5-Leads, Body 2,00x2,10mm, Pitch 0,65mm, IPC Medium Density"
  rect 0.85x0.35 smd: 1(-1.1,0.65) 2(-1.1,0) 3(-1.1,-0.65) 4(1.1,-0.65) 5(1.1,0.65)
  silkscreen extent -1.22,-1.1 0.3,1.5, body extent -1.2,-1.07 1.2,1.07, height 1.1
TPS22918DBVR [mm] "SOT23, 6-Leads, Body 2,90x2,80mm, Pitch 0,95mm, IPC Medium Density"
  rect 1.05x0.6 smd: 1(-1.35,0.95) 2(-1.35,0) 3(-1.35,-0.95) 4(1.35,-0.95) 5(1.35,0) 6(1.35,0.95)
  silkscreen extent -1.48,-1.55 0.5,1.92, body extent -1.5,-1.53 1.5,1.53, height 1.45
TPS62130RGTR [mm] "QFN, 16-Leads, Body 3,00x3,00mm, Pitch 0,50mm, Thermal Pad 1,70x1,70mm, IPC Medium Density"
  rrect50% 0.6x0.25 smd paste+0 mask+0.04: 1(-1.4,0.75) 2(-1.4,0.25) 3(-1.4,-0.25) 4(-1.4,-0.75) 9(1.4,-0.75) 10(1.4,-0.25) 11(1.4,0.25) 12(1.4,0.75)
  rrect50% 0.25x0.6 smd paste+0 mask+0.04: 5(-0.75,-1.4) 6(-0.25,-1.4) 7(0.25,-1.4) 8(0.75,-1.4) 13(0.75,1.4) 14(0.25,1.4) 15(-0.25,1.4) 16(-0.75,1.4)
  rect 1.7x1.7 smd paste+0 mask+0.04: 17(0,0)
  silkscreen extent -2.47,-1.7 1.7,1.7, body extent -1.55,-1.55 1.55,1.55, height 1
TPS74801DRCR [mm] "SON, 10-Leads, Body 3x3mm, Pitch 0.5mm, Thermal Pad 3x1.65mm"
  rect 0.85x0.28 smd mask+0.04: 1(-1.475,1) 2(-1.475,0.5) 3(-1.475,0) 4(-1.475,-0.5) 5(-1.475,-1) 6(1.475,-1) 7(1.475,-0.5) 8(1.475,0) 9(1.475,0.5) 10(1.475,1)
  rect 1.65x2.4 smd paste-1000 mask+0.04: 11(0,0)
  Component Side 1 region: 0.11,1.2 0.11,1.7 0.39,1.7 0.39,1.2
  Component Side 1 region: -0.11,-1.2 -0.11,-1.7 -0.39,-1.7 -0.39,-1.2
  Component Side 1 region: 0.11,-1.2 0.11,-1.7 0.39,-1.7 0.39,-1.2
  Component Side 1 region: -0.11,1.2 -0.11,1.7 -0.39,1.7 -0.39,1.2
  silkscreen extent -2,-1.55 1.55,1.6, body extent -1.5,-1.5 1.5,1.5, height 1
TPS82085SILR [mm] "SON, 8-Leads, Body 3,00x2,80mm, Pitch 0,65mm, Thermal Pad 1,90x1,10mm, IPC High Density"
  rect 0.6x0.5 smd paste-0.05 mask-0.05: 1(-1.1,0.975) 2(-1.1,0.325) 3(-1.1,-0.325) 4(-1.1,-0.975) 5(1.1,-0.975) 6(1.1,-0.325) 7(1.1,0.325) 8(1.1,0.975)
  rect 1.2x2 smd paste-1000 mask-0.05: 9(0,0)
  silkscreen extent -2.05,-1.7 1.6,1.75, body extent -1.45,-1.55 1.45,1.55, height 1.33
VL716-Q4 [mm] "QFN, 48-Leads, Body 6,00x6,00mm, Pitch 0,40mm, Thermal Pad 4,30x4,30mm, IPC Medium Density"
  rrect50% 0.65x0.2 smd mask+0.04: 1(-2.9,2.2) 2(-2.9,1.8) 3(-2.9,1.4) 4(-2.9,1) 5(-2.9,0.6) 6(-2.9,0.2) 7(-2.9,-0.2) 8(-2.9,-0.6) 9(-2.9,-1) 10(-2.9,-1.4) 11(-2.9,-1.8) 12(-2.9,-2.2) 25(2.9,-2.2) 26(2.9,-1.8) 27(2.9,-1.4) 28(2.9,-1) 29(2.9,-0.6) 30(2.9,-0.2) 31(2.9,0.2) 32(2.9,0.6) 33(2.9,1) 34(2.9,1.4) 35(2.9,1.8) 36(2.9,2.2)
  rrect50% 0.2x0.65 smd mask+0.04: 13(-2.2,-2.9) 14(-1.8,-2.9) 15(-1.4,-2.9) 16(-1,-2.9) 17(-0.6,-2.9) 18(-0.2,-2.9) 19(0.2,-2.9) 20(0.6,-2.9) 21(1,-2.9) 22(1.4,-2.9) 23(1.8,-2.9) 24(2.2,-2.9) 37(2.2,2.9) 38(1.8,2.9) 39(1.4,2.9) 40(1,2.9) 41(0.6,2.9) 42(0.2,2.9) 43(-0.2,2.9) 44(-0.6,2.9) 45(-1,2.9) 46(-1.4,2.9) 47(-1.8,2.9) 48(-2.2,2.9)
  rrect2% 4.3x4.3 smd mask+0.07: 49(0,0)
  silkscreen extent -3.92,-3.15 3.15,3.15, body extent -3,-3 3,3, height 0.9
XC7A35T-2CSG325I [mm] "BGA, 324-Balls, Body 15x15mm, Pitch 0.8mm"
  round 0.35 smd mask+0.03: A1(-6.8,6.8) A2(-6,6.8) A3(-5.2,6.8) A4(-4.4,6.8) A5(-3.6,6.8) A6(-2.8,6.8) A7(-2,6.8) A8(-1.2,6.8) A9(-0.4,6.8) A10(0.4,6.8) A11(1.2,6.8) A12(2,6.8) A13(2.8,6.8) A14(3.6,6.8) A15(4.4,6.8) A16(5.2,6.8) A17(6,6.8) A18(6.8,6.8) B1(-6.8,6) B2(-6,6) B3(-5.2,6) B4(-4.4,6) B5(-3.6,6) B6(-2.8,6) B7(-2,6) B8(-1.2,6) B9(-0.4,6) B10(0.4,6) B11(1.2,6) B12(2,6) B13(2.8,6) B14(3.6,6) B15(4.4,6) B16(5.2,6) B17(6,6) B18(6.8,6) C1(-6.8,5.2) C2(-6,5.2) C3(-5.2,5.2) C4(-4.4,5.2) C5(-3.6,5.2) C6(-2.8,5.2) C7(-2,5.2) C8(-1.2,5.2) C9(-0.4,5.2) C10(0.4,5.2) C11(1.2,5.2) C12(2,5.2) C13(2.8,5.2) C14(3.6,5.2) C15(4.4,5.2) C16(5.2,5.2) C17(6,5.2) C18(6.8,5.2) D1(-6.8,4.4) D2(-6,4.4) D3(-5.2,4.4) D4(-4.4,4.4) D5(-3.6,4.4) D6(-2.8,4.4) D7(-2,4.4) D8(-1.2,4.4) D9(-0.4,4.4) D10(0.4,4.4) D11(1.2,4.4) D12(2,4.4) D13(2.8,4.4) D14(3.6,4.4) D15(4.4,4.4) D16(5.2,4.4) D17(6,4.4) D18(6.8,4.4) E1(-6.8,3.6) E2(-6,3.6) E3(-5.2,3.6) E4(-4.4,3.6) E5(-3.6,3.6) E6(-2.8,3.6) E7(-2,3.6) E8(-1.2,3.6) E9(-0.4,3.6) E10(0.4,3.6) E11(1.2,3.6) E12(2,3.6) E13(2.8,3.6) E14(3.6,3.6) E15(4.4,3.6) E16(5.2,3.6) E17(6,3.6) E18(6.8,3.6) F1(-6.8,2.8) F2(-6,2.8) F3(-5.2,2.8) F4(-4.4,2.8) F5(-3.6,2.8) F6(-2.8,2.8) F7(-2,2.8) F8(-1.2,2.8) F9(-0.4,2.8) F10(0.4,2.8) F11(1.2,2.8) F12(2,2.8) F13(2.8,2.8) F14(3.6,2.8) F15(4.4,2.8) F16(5.2,2.8) F17(6,2.8) F18(6.8,2.8) G1(-6.8,2) G2(-6,2) G3(-5.2,2) G4(-4.4,2) G5(-3.6,2) G6(-2.8,2) G7(-2,2) G8(-1.2,2) G9(-0.4,2) G10(0.4,2) G11(1.2,2) G12(2,2) G13(2.8,2) G14(3.6,2) G15(4.4,2) G16(5.2,2) G17(6,2) G18(6.8,2) H1(-6.8,1.2) H2(-6,1.2) H3(-5.2,1.2) H4(-4.4,1.2) H5(-3.6,1.2) H6(-2.8,1.2) H7(-2,1.2) H8(-1.2,1.2) H9(-0.4,1.2) H10(0.4,1.2) H11(1.2,1.2) H12(2,1.2) H13(2.8,1.2) H14(3.6,1.2) H15(4.4,1.2) H16(5.2,1.2) H17(6,1.2) H18(6.8,1.2) J1(-6.8,0.4) J2(-6,0.4) J3(-5.2,0.4) J4(-4.4,0.4) J5(-3.6,0.4) J6(-2.8,0.4) J7(-2,0.4) J8(-1.2,0.4) J9(-0.4,0.4) J10(0.4,0.4) J11(1.2,0.4) J12(2,0.4) J13(2.8,0.4) J14(3.6,0.4) J15(4.4,0.4) J16(5.2,0.4) J17(6,0.4) J18(6.8,0.4) K1(-6.8,-0.4) K2(-6,-0.4) K3(-5.2,-0.4) K4(-4.4,-0.4) K5(-3.6,-0.4) K6(-2.8,-0.4) K7(-2,-0.4) K8(-1.2,-0.4) K9(-0.4,-0.4) K10(0.4,-0.4) K11(1.2,-0.4) K12(2,-0.4) K13(2.8,-0.4) K14(3.6,-0.4) K15(4.4,-0.4) K16(5.2,-0.4) K17(6,-0.4) K18(6.8,-0.4) L1(-6.8,-1.2) L2(-6,-1.2) L3(-5.2,-1.2) L4(-4.4,-1.2) L5(-3.6,-1.2) L6(-2.8,-1.2) L7(-2,-1.2) L8(-1.2,-1.2) L9(-0.4,-1.2) L10(0.4,-1.2) L11(1.2,-1.2) L12(2,-1.2) L13(2.8,-1.2) L14(3.6,-1.2) L15(4.4,-1.2) L16(5.2,-1.2) L17(6,-1.2) L18(6.8,-1.2) M1(-6.8,-2) M2(-6,-2) M3(-5.2,-2) M4(-4.4,-2) M5(-3.6,-2) M6(-2.8,-2) M7(-2,-2) M8(-1.2,-2) M9(-0.4,-2) M10(0.4,-2) M11(1.2,-2) M12(2,-2) M13(2.8,-2) M14(3.6,-2) M15(4.4,-2) M16(5.2,-2) M17(6,-2) M18(6.8,-2) N1(-6.8,-2.8) N2(-6,-2.8) N3(-5.2,-2.8) N4(-4.4,-2.8) N5(-3.6,-2.8) N6(-2.8,-2.8) N7(-2,-2.8) N8(-1.2,-2.8) N9(-0.4,-2.8) N10(0.4,-2.8) N11(1.2,-2.8) N12(2,-2.8) N13(2.8,-2.8) N14(3.6,-2.8) N15(4.4,-2.8) N16(5.2,-2.8) N17(6,-2.8) N18(6.8,-2.8) P1(-6.8,-3.6) P2(-6,-3.6) P3(-5.2,-3.6) P4(-4.4,-3.6) P5(-3.6,-3.6) P6(-2.8,-3.6) P7(-2,-3.6) P8(-1.2,-3.6) P9(-0.4,-3.6) P10(0.4,-3.6) P11(1.2,-3.6) P12(2,-3.6) P13(2.8,-3.6) P14(3.6,-3.6) P15(4.4,-3.6) P16(5.2,-3.6) P17(6,-3.6) P18(6.8,-3.6) R1(-6.8,-4.4) R2(-6,-4.4) R3(-5.2,-4.4) R4(-4.4,-4.4) R5(-3.6,-4.4) R6(-2.8,-4.4) R7(-2,-4.4) R8(-1.2,-4.4) R9(-0.4,-4.4) R10(0.4,-4.4) R11(1.2,-4.4) R12(2,-4.4) R13(2.8,-4.4) R14(3.6,-4.4) R15(4.4,-4.4) R16(5.2,-4.4) R17(6,-4.4) R18(6.8,-4.4) T1(-6.8,-5.2) T2(-6,-5.2) T3(-5.2,-5.2) T4(-4.4,-5.2) T5(-3.6,-5.2) T6(-2.8,-5.2) T7(-2,-5.2) T8(-1.2,-5.2) T9(-0.4,-5.2) T10(0.4,-5.2) T11(1.2,-5.2) T12(2,-5.2) T13(2.8,-5.2) T14(3.6,-5.2) T15(4.4,-5.2) T16(5.2,-5.2) T17(6,-5.2) T18(6.8,-5.2) U1(-6.8,-6) U2(-6,-6) U3(-5.2,-6) U4(-4.4,-6) U5(-3.6,-6) U6(-2.8,-6) U7(-2,-6) U8(-1.2,-6) U9(-0.4,-6) U10(0.4,-6) U11(1.2,-6) U12(2,-6) U13(2.8,-6) U14(3.6,-6) U15(4.4,-6) U16(5.2,-6) U17(6,-6) U18(6.8,-6) V1(-6.8,-6.8) V2(-6,-6.8) V3(-5.2,-6.8) V4(-4.4,-6.8) V5(-3.6,-6.8) V6(-2.8,-6.8) V7(-2,-6.8) V8(-1.2,-6.8) V9(-0.4,-6.8) V10(0.4,-6.8) V11(1.2,-6.8) V12(2,-6.8) V13(2.8,-6.8) V14(3.6,-6.8) V15(4.4,-6.8) V16(5.2,-6.8) V17(6,-6.8) V18(6.8,-6.8)
  silkscreen extent -8.27,-7.5 7.5,7.5, body extent -7.5,-7.5 7.5,7.5, height 1.5

## Part data
C1 C2 C4 C8 C9 C44 C48 C49 C50: library part C0603, "Ceramic Chip Capacitor"
C3 C5 C6 C7 C10 C11 C12 C13 C14 C15 C16 C17 C18 C19 C20 C21 C22 C23 C24 C25 C26 C27 C28 C29 C30 C31 C32 C33 C34 C35 C36 C37 C38 C39 C40 C41 C45 C46 C47 C51 C52 C53 C54 C56 C57 C58 C59 C60 C62 C63 C64 C65 C66 C68 C71 C72 C73 C74 C75 C76 C77 C78 C79 C80 C81 C82 C84 C85 C86 C87 C88 C89: library part C0402, "Ceramic Chip Capacitor"
C42 C61 C67 C69 C70 C83: library part C0805, "Ceramic Chip Capacitor"
C43 C55: library part C1206, "Ceramic Chip Capacitor"
D1: "SCHOTTKY BARRIER DIODE"
D2 D3 D4 D5 D6 D7 D8 D9 D10: library part LED0805, "SMD chip LED"
  D2 D4: Text=DONE
  D3: Text=RED
  D5: Text=LED2_W
  D6: Text=LED5_Y
  D7: Text=LED3_B
  D8: Text=LED6_Y
  D9: Text=LED1_W
  D10: Text=LED4_B
J1 J2 J8: "2.54mm 60-pin header"
J3 J5: library part 5607-4200-SH-HOST, "3M SATA Series Connector (Host)"
J4 J6: library part 5607-4200-SH-DEVICE, "3M SATA Series Connector (Device)"
J7: "USB C Female SMT Connector"
L1 L2: "MULTILAYER CHIP BEAD INDUCTOR FOR POWER LINES"
L3: library part IHLP1212BZER2R2M11, "Commercial Inductors, Low DCR Series"
Q1: "5.5-V, 2-A, 52-m? On-Resistance Load Switch"
R1 R2 R3 R4 R5 R6 R7 R8 R9 R10 R11 R12 R13 R14 R15 R16 R17 R18 R19 R20 R21 R22 R23 R24 R25 R26 R27 R28 R29 R30 R31 R32 R33 R34 R35 R36 R37 R38 R39 R40 R41 R42 R43 R44 R45: library part R0402, "Ceramic Chip Resistor"
U1 U3: "3-A High Efficiency Step-Down Converter"
U2: "Low power step-down DC-DC converter."
U4 U5: "Single Output LDO, 1.5 A, Adjustable 0.8 to 3.6 V Output, 0.8 to 5.5 V Input, with Programmable Soft Start, 10-pin SON (DRC), -40 to 125 degC, Green (RoHS & no Sb/Br)", Manufacturer="Texas Instruments", Power Good=TRUE, Rating=Catalog, Supplier Part Number 1=296-21563-2-ND, Accuracy(%)=2, ComponentLink1Description="Manufacturer URL", ComponentLink1URL=http://www.ti.com/, ComponentLink2Description=Datasheet, ComponentLink2URL=http://www.ti.com/general/docs/lit/getliterature.tsp?genericPartNumber=TPS74801&fileType=pdf, ComponentLink3Description="Package Specification", ComponentLink3URL=http://www.ti.com/litv/pdf/mpds117k, ComponentLink4Description="URL Link1", ComponentLink4URL="Samples URL:http://www.ti.com/product/tps74801#samples", DatasheetVersion=SBVS074J, Eco-Plan="Green (RoHS & no Sb/Br)", Iout(Max)(A)=1.5, Iq(Typ)(mA)=1, Mounting Technology="Surface Mount", PackageDescription="10-Pin Plastic Small Outline, Body 3 x 3 mm, Pitch 0.5 mm", PackageReference=DRC10-2400X1650TP, PackageVersion=4204102-3/L, PartNumber=TPS74801DRCR, SubFamily="Single Channel LDO", Supplier 1=Digi-Key, Supplier 2=Digi-Key, Supplier 3=Digi-Key, Supplier 4=Newark, Supplier 5=Mouser, Supplier Part Number 2=296-21563-1-ND, Supplier Part Number 3=296-21563-6-ND, Supplier Part Number 4=30M1868, Supplier Part Number 5=595-TPS74801DRCR, Vdo(Typ)(mV)=60, Vin(Max)(V)=5.5, Vin(Min)(V)=0.8, Vout Adj(Max)(V)=3.6, Vout Adj(Min)(V)=0.8
U6: "Dual Voltage Detector, 2 Supply Monitored, -40 to 85 degC, 5-pin SC70 (DCK), Green (RoHS & no Sb/Br)", Manufacturer="Texas Instruments", Rating=Catalog, Supplier Part Number 1=296-13407-2-ND, Threshold Voltage 1 (typ)(Typ)(V)=3.05, Threshold Voltage 2 (typ)(Typ)(V)=Adjustable, # of supplies monitored=2, Code_JEDEC=MO-203-AA, ComponentLink1Description=Datasheet, ComponentLink1URL=http://www.ti.com/general/docs/lit/getliterature.tsp?genericPartNumber=TPS3805H33&fileType=pdf, DatasheetVersion=SLVS392A, Iq(Typ)(uA)=3, Mounting Technology="Surface Mount", Output Driver Type / Reset Output="Active-low, Push-pull", PackageDescription="5-Pin Plastic Small-Outline Package, 2 x 1.3 mm Body, 0.65 mm Pitch, 2.1 mm Lead Span", PackageReference=DCK5, PackageVersion="revG, Jan-2007", PartNumber=TPS3805H33DCKR, Reset Threshold Accuracy(%)=1.5, SubFamily="Supervisor and Reset IC", Supplier 1=Digi-Key, Supplier 2=Digi-Key, Supplier 3=Digi-Key, Supplier 4=Newark, Supplier 5=Mouser, Supplier Part Number 2=296-13407-1-ND, Supplier Part Number 3=296-13407-6-ND, Supplier Part Number 4=77C0394, Supplier Part Number 5=595-TPS3805H33DCKR, VCC(Max)(V)=6, VCC(Min)(V)=1.3
U7: "Low Power, Standard Frequency Oscillator"
U8: "Low-Jitter Precision LVDS Oscillator"
U9: "256 Mbit (32 Mbyte)  3.0V SPI Flash Memory"
U10: "Artix-7 FPGA, 150 User I/Os, 4 GTP, 324-Ball BGA, Speed Grade 2, Industrial Grade, Pb-Free", Manufacturer=Xilinx, Operating Temperature Range=Industrial, Available User I/O=150, Clock Mgmt Tiles (CMTs)=5, ComponentLink1Description="Manufacturer URL", ComponentLink1URL=http://www.xilinx.com/, ComponentLink2Description=Datasheet, ComponentLink2URL=http://www.xilinx.com/support/documentation/data_sheets/ds180_7Series_Overview.pdf, ComponentLink3Description="Package Specification", ComponentLink3URL=http://www.xilinx.com/support/documentation/user_guides/ug475_7Series_Pkg_Pinout.pdf, ComponentLink4Description="DC and Switching Characteristics", ComponentLink4URL=http://www.xilinx.com/support/documentation/data_sheets/ds181_Artix_7_Data_Sheet.pdf, ComponentLink5Description="Package File", ComponentLink5URL=http://www.xilinx.com/support/packagefiles/a7packages/xc7a200tsbg484pkg.txt, ComponentLink6Description="Packaging and Pinout", ComponentLink6URL=http://www.xilinx.com/support/documentation/user_guides/ug475_7Series_Pkg_Pinout.pdf, DatasheetVersion=v1.15, GTP=4, Logic Cells=33280, Maximum Distributed RAM="400 Kb", Mounting Technology="Surface Mount", NexusDeviceID=XC7A35T-2CSG325I, PackageDescription="324-Ball Wire-Bond Chip-Scale BGA, Body 15 x 15 mm, Pitch 0.8 mm", PackageReference=CSG-325, PackageVersion="Rev. 1.11", PartNumber=XC7A35T-2CSG325I, Speed Grades=2, Total Block RAM="1800 Kb"
U11: "Single Schmitt-Trigger Inverter"
U12 U13 U14 U15: "4-Channel ESD Protection Device for Super-Speed (Up to 6 Gbps)  Interface"
U16: "4-Channel High-Performance Differential Switch"
U17: "USB 3.1 to SATA 6Gb/s bridge controller with USB type-C connector support"
U18: "Buck Step Down Regulator with 3 to 17 V Input and 0.9 to 6 V Output, -40 to 85 degC, 16-Pin QFN (RGT), Green (RoHS & no Sb/Br)", Manufacturer="Texas Instruments", Rating=Catalog, Supplier Part Number 1=TPS62130RGTR-ND, Switch Current Limit(Typ)(A)=4.2, Code_JEDEC=MO-220, ComponentLink1Description=Datasheet, ComponentLink1URL=http://www.ti.com/general/docs/lit/getliterature.tsp?genericPartNumber=TPS62130&fileType=pdf, ComponentLink2Description="Package Specification", ComponentLink2URL=http://www.ti.com/litv/pdf/mpqf119g, ComponentLink3Description="URL Link1", ComponentLink3URL="Samples URL:http://www.ti.com/product/tps62130#samples", DatasheetVersion=SLVSAG7, Duty Cycle(Max)(%)=100, Eco-Plan="Green (RoHS & no Sb/Br)", Iout(Max)(A)=3, Iq(Typ)(mA)=0.017, Mounting Technology="Surface Mount", PackageDescription="16-Pin Plastic Quad Flat No-Lead, 3 x 3 mm Body, 0.5 mm Pitch, 1.7 x 1.7 mm Exposed Pad", PackageReference=RGT16-1700X1700TP, PackageVersion="revH, Oct-2011", PartNumber=TPS62130RGTR, Regulated Outputs(#)=1, SubFamily="Step-Down Regulator", Supplier 1=Digi-Key, Supplier 2=Newark, Supplier 3=Mouser, Supplier Part Number 2=74T5526, Supplier Part Number 3=595-TPS62130RGTR, Synchronous Rectification=TRUE, Topology=Buck, Vin(Max)(V)=17, Vin(Min)(V)=3, Vout(Max)(V)=6, Vout(Min)(V)=0.9

## Free pads (board coordinates)
  round 0 on Mech16 paste+0 mask+0: 1(97.409,110.744)
  round 5 hole 3: ""(55.27,81.8) ""(55.27,170.73) ""(145.77,81.8) ""(145.77,170.73)

## Via types
v1: diameter 0.5, hole 0.2, Component Side 1 to Component Side 2, 344 vias
v2: diameter 0.4, hole 0.2, Component Side 1 to Component Side 2, tented top, 149 vias
v3: diameter 0.6, hole 0.3, Component Side 1 to Component Side 2, 33 vias
v4: diameter 0.5, hole 0.2, Component Side 1 to Component Side 2, tented top, 14 vias
v5: diameter 0.5, hole 0.2, Component Side 1 to Component Side 2, tented bottom, 5 vias

## Nets (pads, with @x,y where several pads share a name; then routed paths per layer and width w, separated by ;. In a path a pad name is that pad's centre, name@x,y a point inside that pad or via, vN(x,y) a via of type N, cw(c..) or ccw(c..) an arc to the next point about the centre after c; other vN are vias at no path point)
1.0V: C2.2 C55.2 C56.2 C57.2 C58.2 C59.2 C60.2 C67.2 C68.1 J1.58 R1.2 U1.8 U10.F7 U10.F9 U10.F11 U10.G8 U10.G10 U10.H7 U10.H9 U10.H11 U10.J8 U10.J12 U10.K7 U10.K11 U10.L8 U10.L12 U10.M7 U10.M11 U10.N8 U10.N10 U10.N12 U10.P9 U10.P11 | length 162.4
  Component Side 1 w0.127: v1(63.8,135.5) 66.154,137.854 66.154,144.054 70.2,148.1 v1(72,148.1) ; J1.58@109.64,93.88 112.1,91.42 v1(112.1,85.7)
  Component Side 1 w0.2: v2(79.4,148.4) U10.F9@79.8,148.8 ; U10.F7@79.8,147.2 v2(80.2,147.6) U10.G8@80.6,148 v2(81,148.4) U10.H9@81.4,148.8 ; U10.F11@79.8,150.4 v2(80.2,150) U10.G10@80.6,149.6 ; U10.H7@81.4,147.2 v2(81.8,147.6) U10.J8@82.2,148 ; U10.H11@81.4,150.4 v2(81.8,150.8) U10.J12@82.2,151.2 ; U10.K7@83,147.2 v2(83.4,146.8) ; U10.K11@83,150.4 v2(83.4,150.8) U10.L12@83.8,151.2 v2(84.2,151.6) ; U10.L8@83.8,148 v2(84.2,147.6) U10.M7@84.6,147.2 ; U10.M11@84.6,150.4 v2(85,150.8) U10.N12@85.4,151.2 ; U10.N8@85.4,148 v2(85.8,148.4) U10.P9@86.2,148.8 ; U10.N10@85.4,149.6 v2(85.8,150) U10.P11@86.2,150.4
  Component Side 2 w0.127: v1(63.8,135.5) 62.3,134 58.959,134 56.254,131.295 56.254,88.705 63.18,81.78 63.18,81.76 64.332,80.608 104.808,80.608 105.546,81.346 105.546,84.505 106.741,85.7 v1(112.1,85.7)
  Component Side 2 w0.3: C2.2@93.8,138.875 v1(93.8,139.788) 93.8,140.7 94.575,141.475 R1.2@95.1,141.475 ; U1.8@95.675,139.1 U1.8@95.7,139.075
  Component Side 2 w0.4: v1(83.6,138.1) 83.6,139.025 C55.2@83.975,139.4 84.4,138.975 v1(84.4,138.1)
  Component Side 2 w0.5: v1(72,148.1) C67.2@73,148.1 ; v1(95.045,139.1) U1.8@95.675,139.1
1.0V_MGT: C11.2 C49.2 C51.2 C53.2 J1.55 R10.2 U4.9 U4.10 U10.B4 U10.C5 U10.E5 U10.F5 | length 141.7
  Component Side 1 w0.127: v1(56.8,135.3) 56.8,135.7 63.146,142.046 63.146,142.705 64.495,144.054 65.076,144.054 66.9,145.878 v1(66.9,146.7) ; J1.55@107.1,96.42 108.2,95.32 108.2,85.2 107.671,84.671 v1(107.671,84)
  Component Side 1 w0.2: v2(76.2,144.4) U10.B4@76.6,144.8 ; v2(77,145.2) U10.C5@77.4,145.6 ; U10.E5@79,145.6 v2(79.4,145.2) U10.F5@79.8,145.6
  Component Side 2 w0.127: v1(56.8,135.3) 56.3,135.3 55.466,134.466 55.466,88.359 64.005,79.82 105.134,79.82 107.696,82.382 107.696,83.975 v1(107.671,84)
  Component Side 2 w0.254: U4.10@66.075,148.3 66.7,148.3 v1(66.9,148.5) 66.6,148.8 U4.9@66.075,148.8
  Component Side 2 w0.3: C11.2@66.18,146.7 v1(66.9,146.7) ; v1(68.1,147.9) 68.775,147.9 R10.2@68.8,147.925 ; C49.2@73.075,144.6 C49.2@73.1,144.575
  Component Side 2 w0.5: v1(72.2,144.6) C49.2@73.075,144.6
1.2V_MGT: C15.2 C50.2 C52.2 C54.2 J1.53 R13.1 R14.1 R30.1 U5.9 U5.10 U10.A2 U10.C1 U10.E1 U10.F3 U10.G2 | length 140.8
  Component Side 1 w0.153: v1(106.6,84) 106,84.6 106,97.86 J1.53@107.1,98.96
  Component Side 1 w0.2: v2(75.4,142.8) U10.A2@75.8,143.2 ; v2(77,142) U10.C1@77.4,142.4 ; v2(78.6,142) U10.E1@79,142.4 ; v2(79.4,143.6) U10.F3@79.8,144 ; v2(80.2,142.8) U10.G2@80.6,143.2
  Component Side 2 w0.127: R30.1@75,143.925 R30.1@75.1,143.825 ; C52.2@75.3,142.9 v2(75.4,142.8) C52.2@75.4,143 ; C50.2@77.975,139.4 C50.2@78,139.375
  Component Side 2 w0.153: C15.2@66.18,139.2 66.18,138.78 63.4,136 58.2,136 55.733,133.533 55.733,88.47 64.116,80.087 105.024,80.087 106.6,81.663 v1(106.6,84) v1@106.7,84
  Component Side 2 w0.2: R30.1@75,143.925 75,143.4 C52.2@75.4,143
  Component Side 2 w0.254: U5.10@66.075,140.8 66.7,140.8 v1(66.9,141) 66.6,141.3 U5.9@66.075,141.3
  Component Side 2 w0.3: C15.2@66.18,139.2 v1(66.9,139.2) ; v1(68.1,140.4) 68.775,140.4 R13.1@68.8,140.425 69.3,140.425 R14.1@69.8,140.425
  Component Side 2 w0.5: v1(78,138.5) C50.2@78,139.375
1.8V: C4.2 C61.1 C62.1 C63.1 C64.1 C65.1 C66.1 J1.60 R15.2 R16.2 U2.3 U10.E11 U10.G12 U10.H13 U10.J10 U10.K13 U10.M13 U10.P13 | length 273.2
  Component Side 1 w0.127: v1(59.5,134.9) 59.5,138.041 63.4,141.941 63.4,142.6 64.6,143.8 65.182,143.8 65.341,143.959 67.5,146.118 67.5,152 v1(66.6,152.9) ; v1(96.9,165.7) v1(96.9,167.6) ; J1.60@109.64,91.34 111.4,89.58 111.4,86.3 v1(110.3,85.2) ; v1(139,148.9) v1(139,154.5)
  Component Side 1 w0.2: v2(78.6,150.8) U10.E11@79,150.4 ; v2(80.2,151.6) U10.G12@80.6,151.2 ; v2(81,152.4) U10.H13@81.4,152 ; v2(81.8,150) U10.J10@82.2,149.6 ; U10.K13@83,152 v2(83.4,152.4) ; U10.M13@84.6,152 v2(85,152.4) ; U10.P13@86.2,152 v2(86.6,152.4)
  Component Side 2 w0.127: v1(59.5,134.9) 58.4,134.9 56,132.5 56,104.5 56,88.6 62.926,81.674 62.926,81.655 64.227,80.354 104.913,80.354 105.8,81.241 105.8,84.4 106.6,85.2 v1(110.3,85.2) ; v1(66.6,152.9) 66,153.5 59.5,153.5 58.5,154.5 58.5,160 63.892,165.392 67.608,165.392 68.45,164.55 U2.3@68.45,163.375 ; v1(83.5,159.8) 84,160.3 88,160.3 91.3,163.6 95.4,163.6 96.9,165.1 v1(96.9,165.7) ; v1(96.9,167.6) 99.882,167.6 100.765,168.483 136.409,168.483 139,165.892 v1(139,154.5) ; R15.2@125.5,141.375 136.275,141.375 139,144.1 v1(139,148.9)
  Component Side 2 w0.3: C61.1@83.5,158.8 C61.1@83.6,158.7 ; R16.2@124.5,141.375 R15.2@125.5,141.375
  Component Side 2 w0.5: U2.3@68.45,163.375 v1(69.275,163.375) 70.175,163.375 C4.2@70.2,163.4 ; C61.1@83.5,158.8 v1(83.5,159.8)
1.35V: C9.2 C10.2 C14.2 J1.56 R6.2 U3.8 U4.1 U4.2 U5.1 U5.2 | length 129.2
  Component Side 1 w0.127: v1(109,84) 109,84.7 108.5,85.2 108.5,95.28 J1.56@109.64,96.42
  Component Side 2 w0.127: C14.2@63.02,139.2 60.22,136.4 56.3,136.4 55.212,135.312 55.212,88.254 63.9,79.566 105.24,79.566 109,83.326 v1(109,84)
3.3V: C7.2 C69.2 C70.2 C71.2 C72.2 C73.2 C74.2 C75.2 C76.2 C77.2 C78.2 C79.2 C80.2 C81.2 C82.2 J1.8 J1.10 J1.21 J1.27 J1.31 J1.51 J1.59 Q1.6 R23.1 R24.1 R25.1 R26.1 R27.1 R28.2 R29.1 R32.2 U6.4 U9.8 U10.A16 U10.B13 U10.C10 U10.D17 U10.E10 U10.E14 U10.G18 U10.H15 U10.L16 U10.P17 U10.R10 U10.R14 U10.T11 U10.U8 U10.U18 U10.V15 U11.5 | length 118.8
  Component Side 1 w0.153: R32.2@56.4,164.725 v1(56.4,165.6)
  Component Side 1 w0.2: v2(75.4,154.8) U10.A16@75.8,154.4 ; v2(76.2,152.4) U10.B13@76.6,152 ; v2(77,150) U10.C10@77.4,149.6 ; v2(77.8,155.6) U10.D17@78.2,155.2 ; v2(78.6,150) U10.E10@79,149.6 ; v2(78.6,153.2) U10.E14@79,152.8 ; v2(80.2,156.4) U10.G18@80.6,156 ; v2(81,154) U10.H15@81.4,153.6 ; U10.L16@83.8,154.4 v2(84.2,154.8) ; U10.P17@86.2,155.2 v2(86.6,155.6) ; U10.R10@87,149.6 v2(87.4,150) ; U10.R14@87,152.8 v2(87.4,153.2) ; U10.T11@87.8,150.4 v2(88.2,150.8) ; U10.U8@88.6,148 v2(89,147.6) ; U10.U18@88.6,156 v2(89,156.4) ; U10.V15@89.4,153.6 v2(90.1,153.6)
  Component Side 1 w0.3: R32.2@56.4,164.725 R32.2@56.425,164.7 ; v1(85.5,166.4) 86.485,166.4 U9.8@86.49,166.405
  Component Side 1 w0.6: v3(81.9,161) v3(85.4,161)
  Component Side 2 w0.152: R28.2@93.975,165 v1(94.7,165) ; R23.1@93.975,166 v1(94.7,166)
  Component Side 2 w0.153: v1(93.2,152.1) R25.1@94.6,152.1 ; R28.2@93.875,165 R28.2@93.975,165 ; R25.1@94.6,152.075 R26.1@95.7,152.075 R29.1@96.8,152.075 R27.1@97.9,152.075 ; J1.59@107.1,91.34 106,92.44 106,100.4 J1.51@107.1,101.5 ; Q1.6@120.75,148.25 119.45,148.25 118.9,147.7 118.9,145.85 U6.4@123.2,141.55
  Component Side 2 w0.3: R24.1@54.2,165.475 56.275,165.475 v1(56.4,165.6) 57.2,166.4 v1(85.5,166.4) ; v1(101.15,157.25) U11.5@101.15,157.95
  Component Side 2 w0.4: Q1.6@120.75,148.25 v1(121.62,149.12) C7.2@121.62,149.9
  Component Side 2 w0.5: v1(72,150.3) C70.2@73.1,150.3 ; C69.2@92.1,152.1 v1(93.2,152.1)
  Component Side 2 w0.6: J1.51@107.1,101.5 103,101.5 101.3,103.2 101.3,130.7 102.58,131.98 J1.27@107.1,131.98
12V_GND: J8.9 J8.10 J8.11 J8.13
12V_PWR: J8.3 J8.5 J8.7 J8.8
ADV_MGT_CLK_N: J1.30 U10.B5 | length 85.9
  Component Side 1 w0.127: v1(65.6,129) 65.327,128.727 65.327,128.473 65.673,128.127 70.727,128.127 v1(71,128.4) ; v1(68,137.6) 68.273,137.873 68.632,137.873 69.35,138.591 69.35,143.391 71.432,145.473 74.527,145.473 74.9,145.1 75.3,145.1 75.392,145.192 75.945,145.192 76.192,145.438 76.192,145.442 76.349,145.6 U10.B5@76.6,145.6 ; v1(98.1,122.5) 98.373,122.227 103.627,122.227 v1(103.9,122.5)
  Component Side 2 w0.127: v1(65.6,129) 65.327,129.273 65.327,135.6 67.6,137.873 67.727,137.873 v1(68,137.6) ; v1(71,128.4) 71.273,128.127 73.473,128.127 79.373,122.227 97.827,122.227 v1(98.1,122.5) v1@98.154,122.5 ; v1(103.9,122.5) 103.627,122.227 103.032,122.227 102.727,122.532 102.727,123.1 102.727,125.194 102.908,125.194 102.908,125.521 102.727,125.521 102.727,125.848 102.908,125.848 102.908,126.175 102.727,126.175 102.727,126.502 102.908,126.502 102.908,126.829 102.727,126.829 102.727,127.156 102.908,127.156 102.908,127.483 102.727,127.483 102.727,127.81 102.908,127.81 102.908,128.137 102.727,128.137 102.727,128.3 102.727,129.527 103.783,130.583 108.497,130.583 J1.30@109.64,129.44
ADV_MGT_CLK_P: J1.28 U10.B6 | length 85.9
  Component Side 1 w0.127: v1(64.8,129) 65.073,128.727 65.073,128.368 65.568,127.873 70.727,127.873 v1(71,127.6) ; v1(68,138.4) 68.273,138.127 68.527,138.127 69.096,138.696 69.096,143.496 71.327,145.727 74.527,145.727 74.9,146.1 75.3,146.1 75.392,146.008 76.408,146.008 76.6,146.2 U10.B6@76.6,146.4 ; v1(98.1,121.7) 98.373,121.973 103.627,121.973 v1(103.9,121.7)
  Component Side 2 w0.127: v1(64.8,129) 65.073,129.273 65.073,135.705 67.495,138.127 67.727,138.127 v1(68,138.4) ; v1(71,127.6) 71.273,127.873 73.368,127.873 79.268,121.973 97.827,121.973 v1(98.1,121.7) v1@98.154,121.7 ; v1(103.9,121.7) 103.627,121.973 102.927,121.973 102.473,122.427 102.473,129.632 103.678,130.837 108.497,130.837 J1.28@109.64,131.98
B14_L0: J2.53 U10.L14 | length 76
  Component Side 1 w0.127: J2.53@68.96,172 71.011,174.051 105.09,174.051 105.575,173.566 105.575,163.575 105,163 v1(104.7,163) ; U10.L14@83.8,152.8 v2(84.2,153.2)